# Allegro board my_democ2.brd
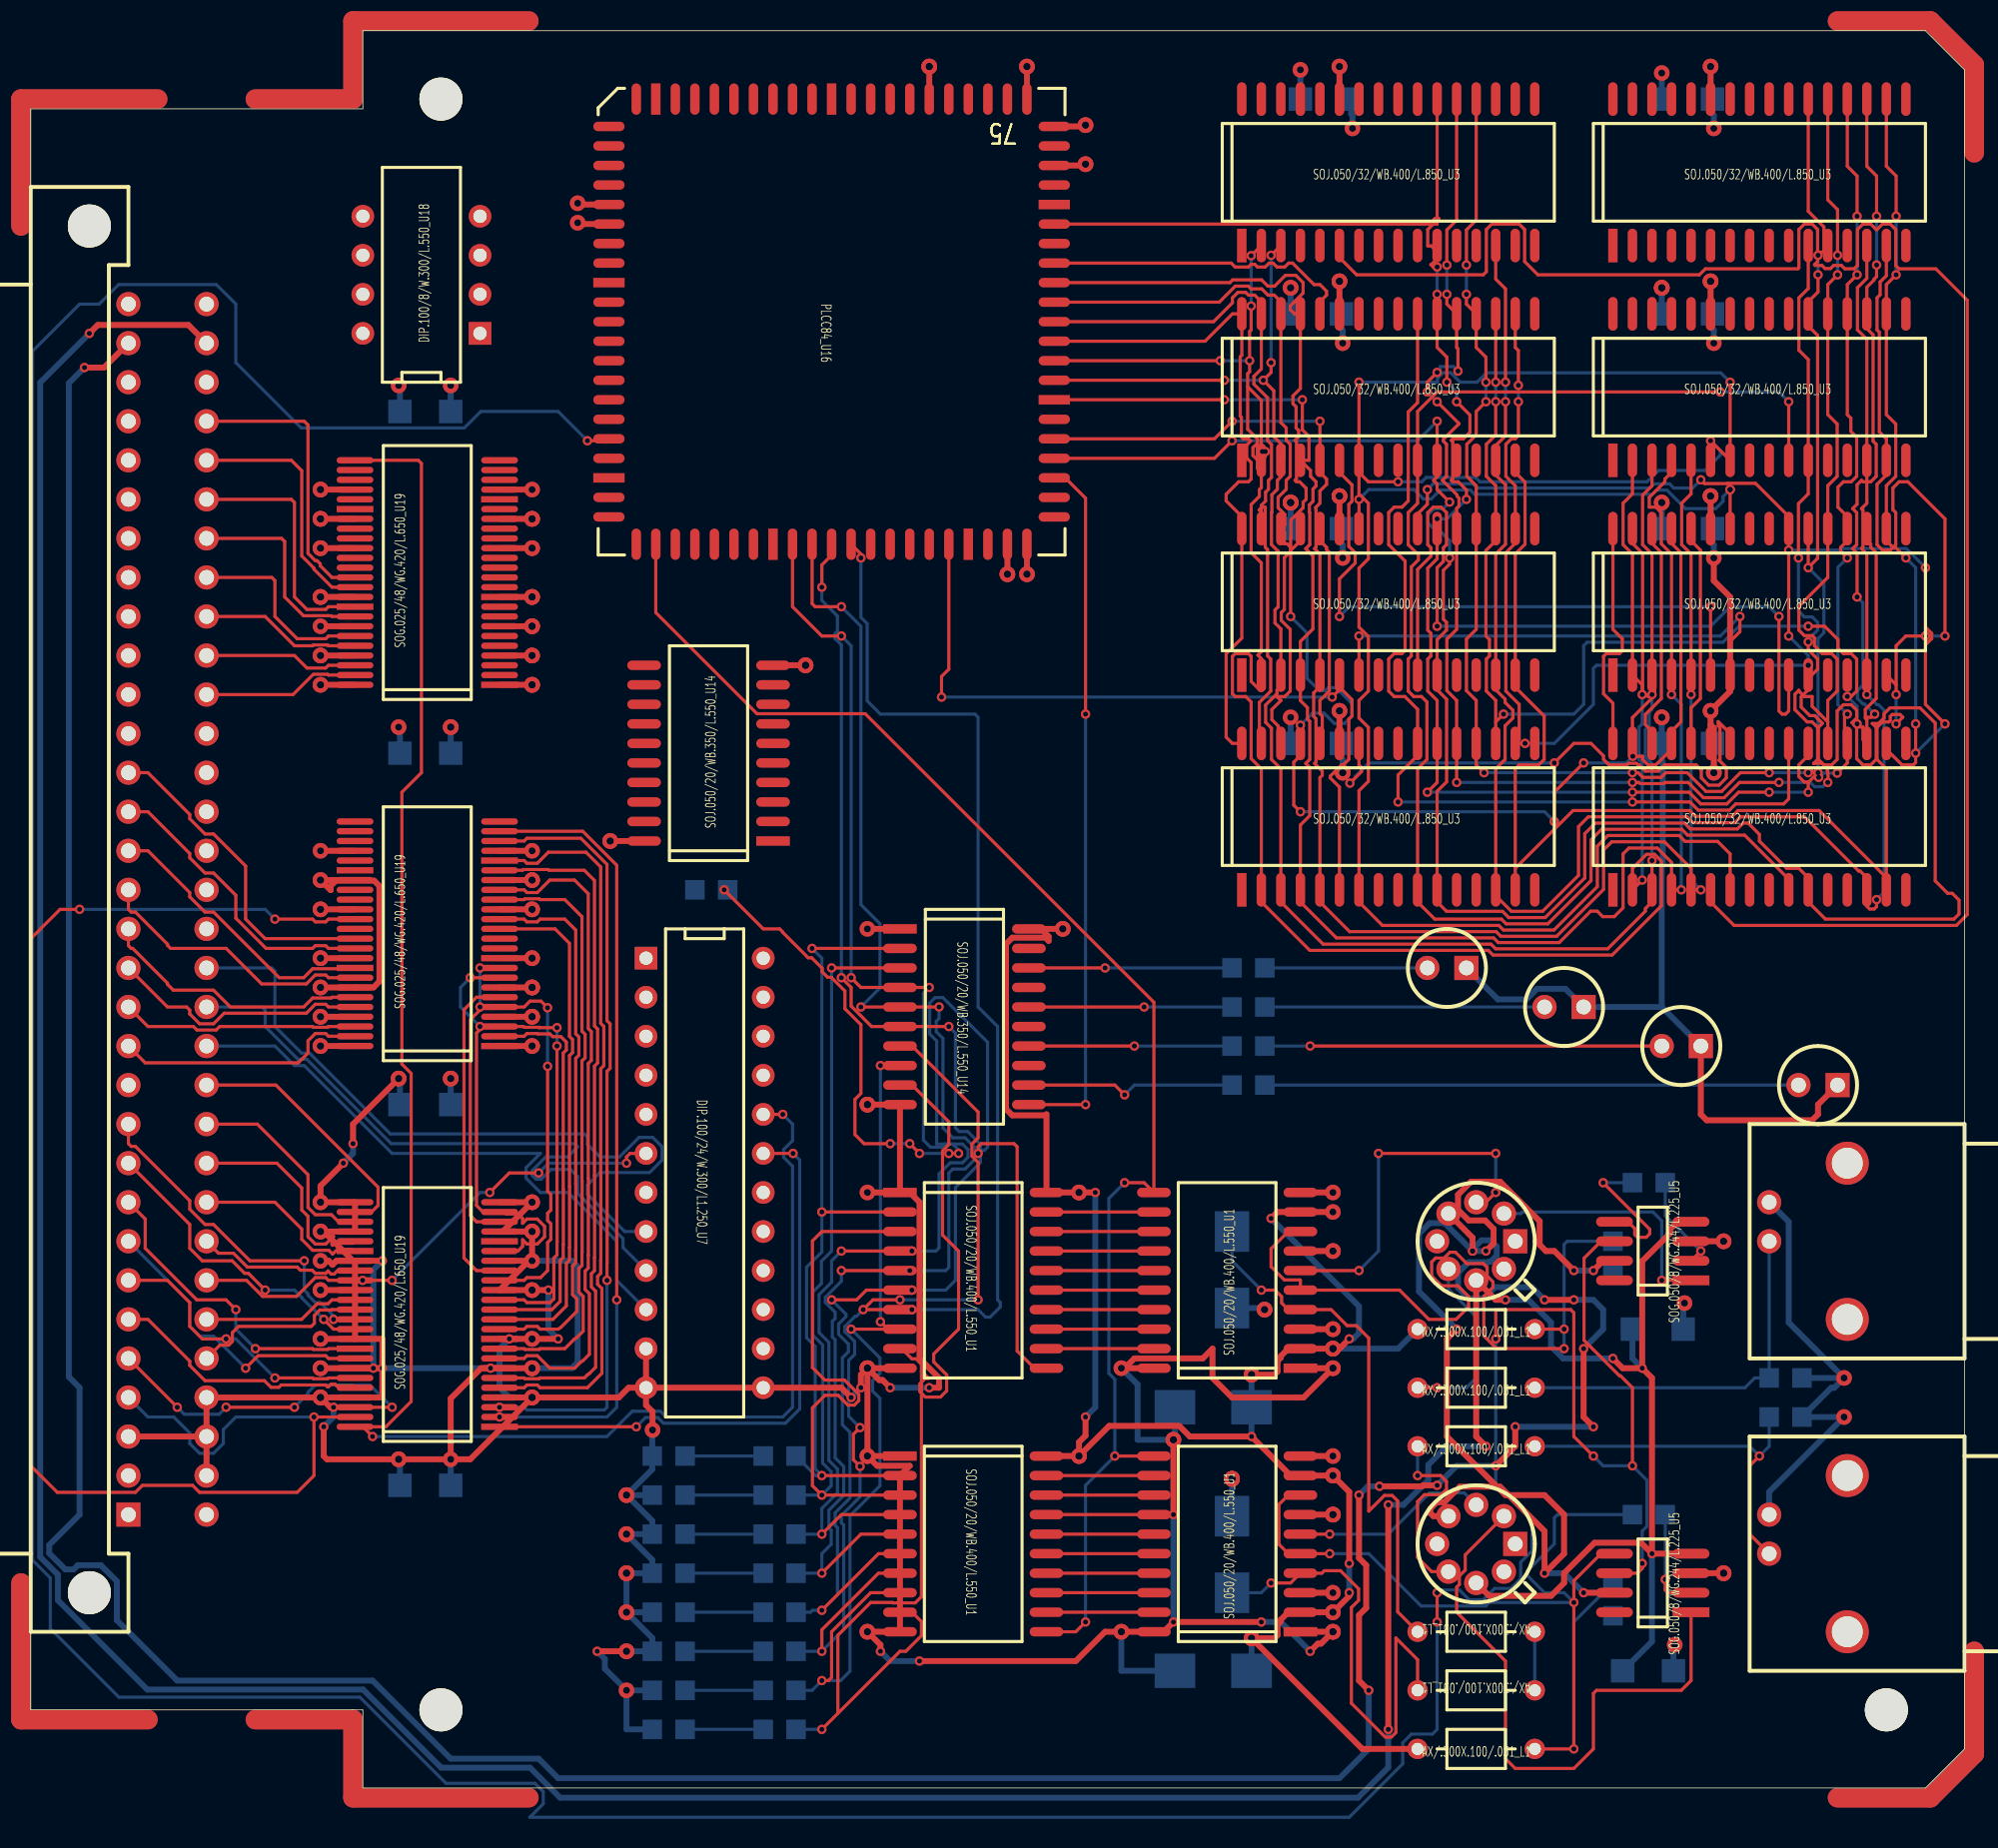
[diagram p0: board, top side]
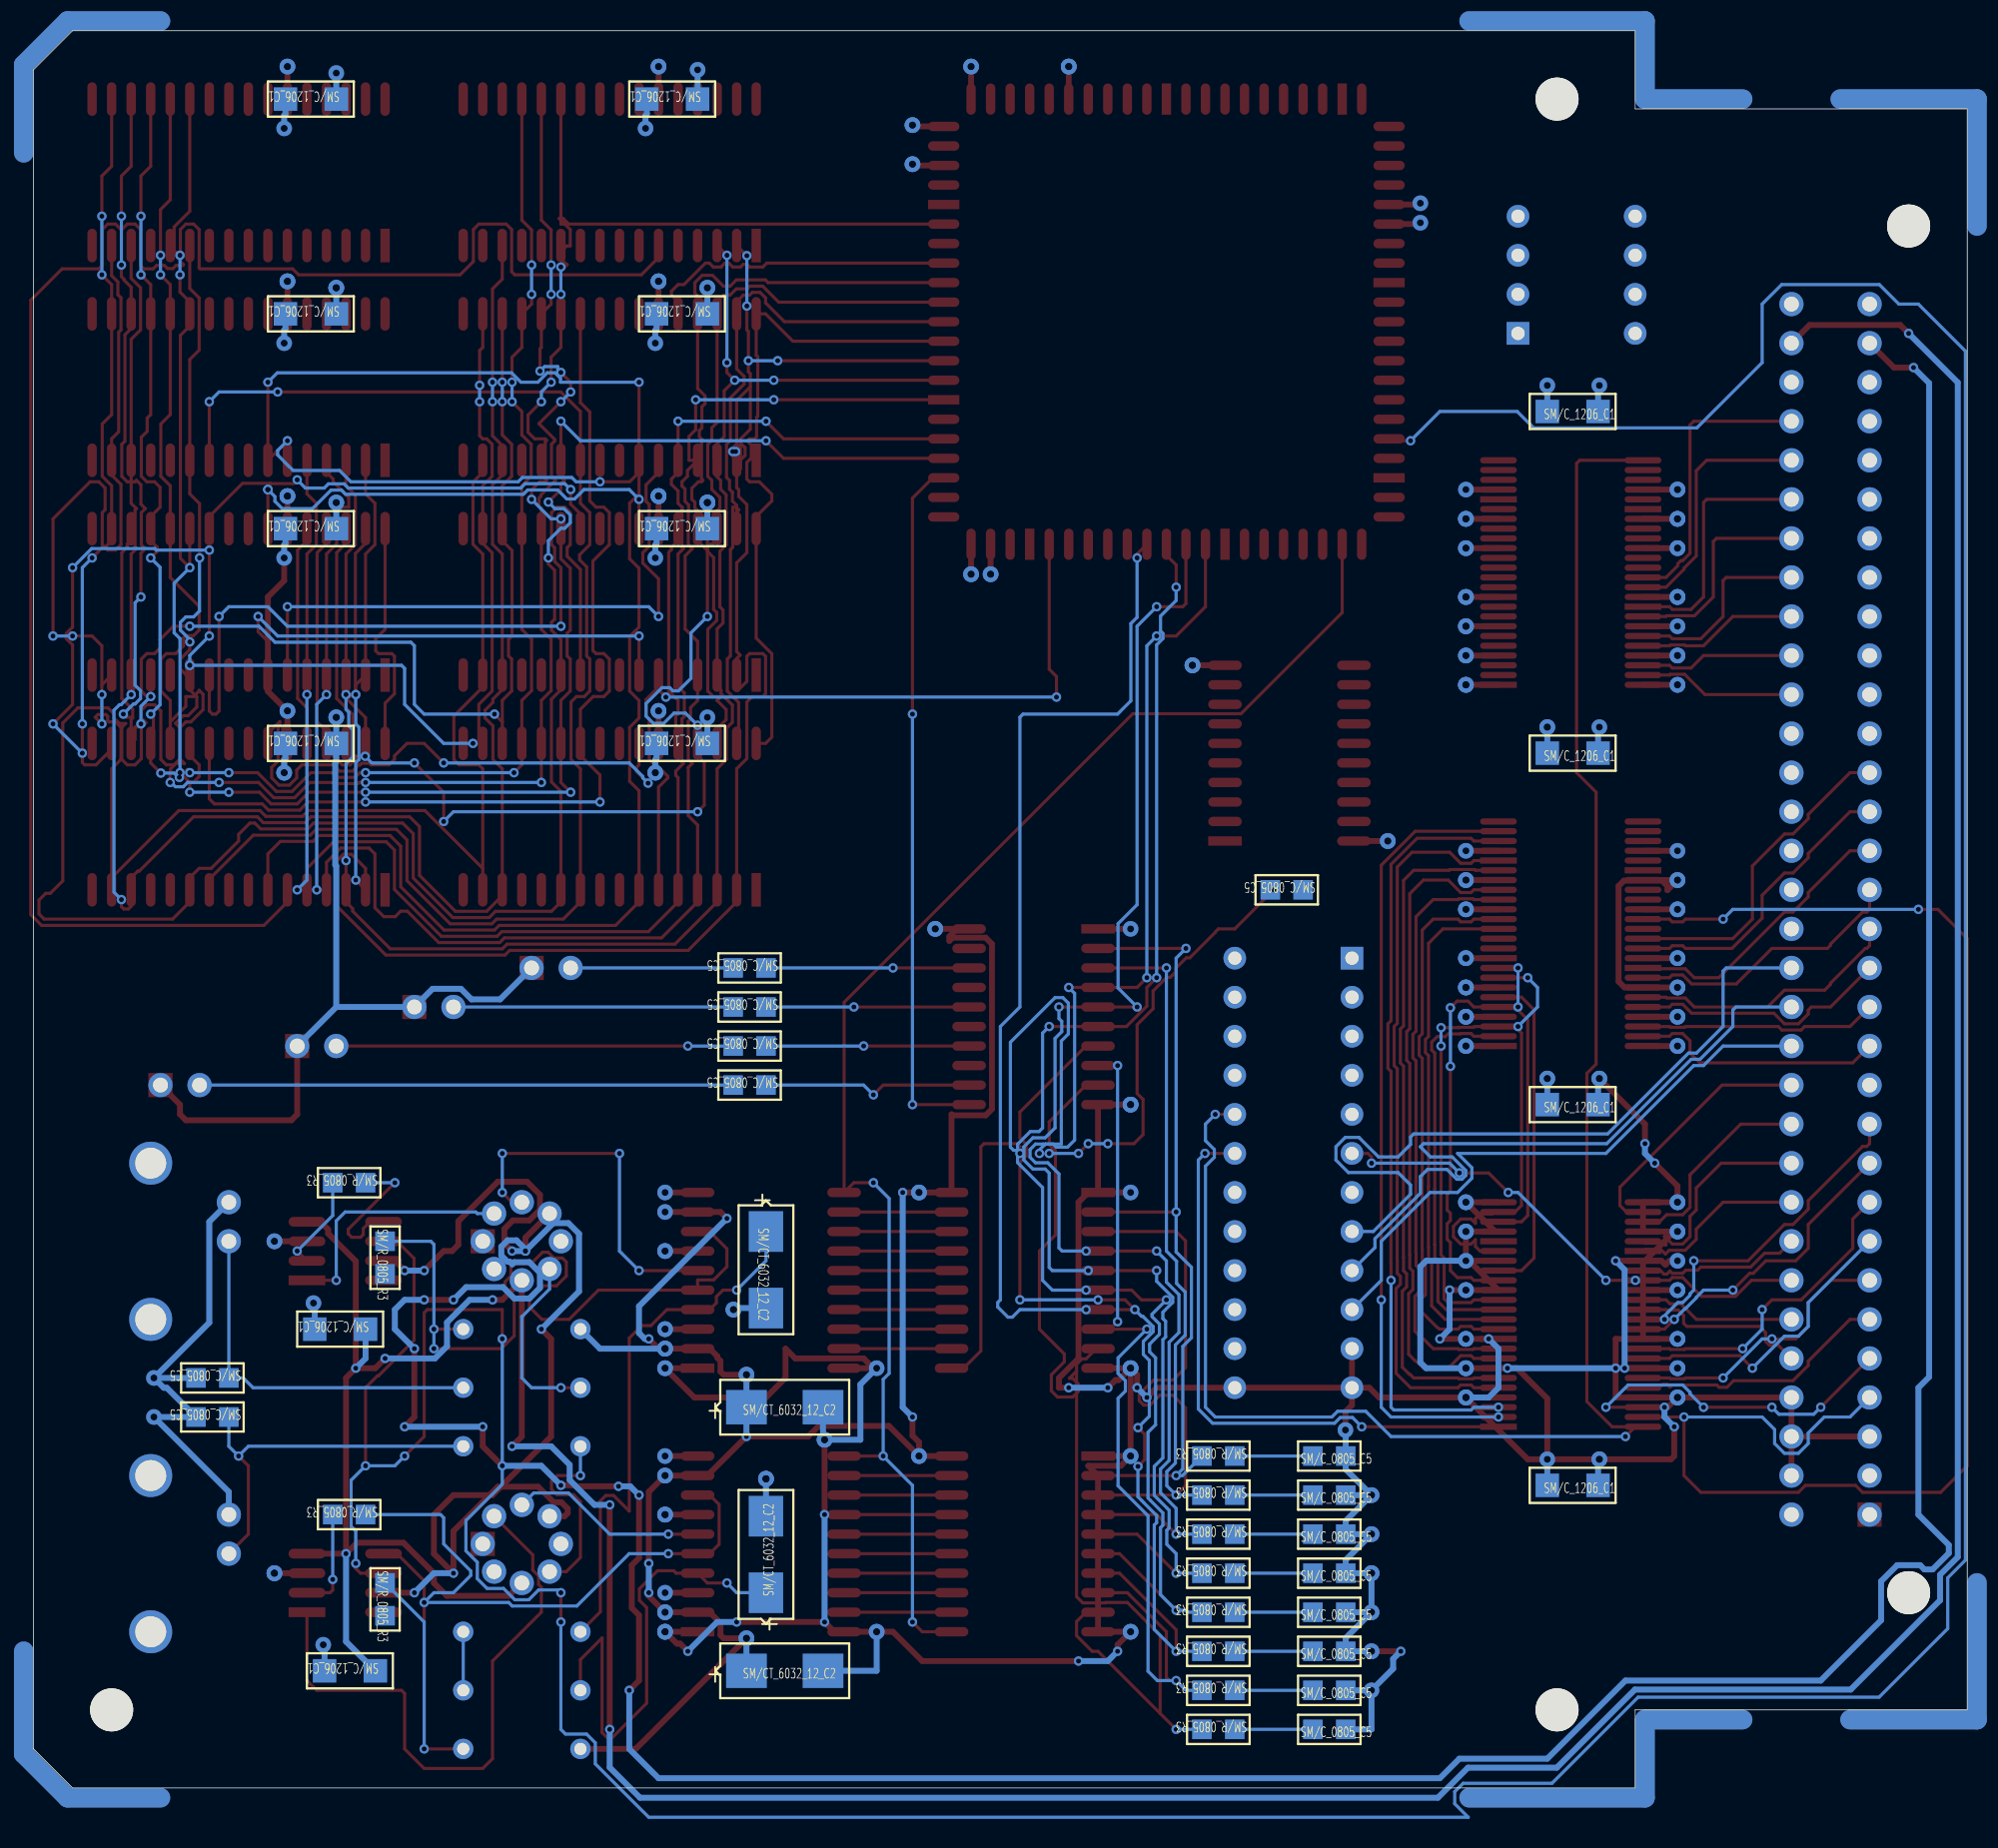
[diagram p1: board, bottom side, seen from below]

Outline 125.73 x 114.3 mm; copper layers: TOP, GND, POWER, BOTTOM. Coordinates in mm from the lower left corner of the outline.
Outline path: 0,109.22 21.59,109.22 21.59,114.3 123.19,114.3 125.73,111.76 125.73,2.54 123.19,0 21.59,0 21.59,5.08 0,5.08 0,109.22

## Design rules (mm)
nets with their own width: min track width 0.203; nets A0 A1 A2 A3 A4 A5 A6 A7 A8 A9 A10 A11 A12 A13 A14 A15 A16 A17 A18 A19 A20 A21 A22 A23 AEN/ BA0 BA1 BA2 BA3 BD0 BD1 BD2 BD3 BD4 BD5 BD6 BD7 BD8 BD9 BD10 BD11 BD12 BD13 BD14 BD15 BRD/ BRESET BWR/ D0 D1 D2 D3 D4 D5 D6 D7 D9 D10 D11 D12 D13 D14 D15 DDIR DEN/ DHEN/ FPGA/ GAIN HS/ MCLK MRD/ MWR/ N00036 N00036_6360 N00038 N00038_6372 N00044 N00044_6366 N00046 N00046_6362 N00048 N00048_6359 N00060 N00060_6368 N00306 N00318 N00322 N00671 N00689 N00703 N00717 N00827 N00831 N00835 N00837 N04966 N05690 N05692 N05694 N05696 N05698 N05700 N05702 N05704 N11940 N11950 N11984 N11994 N12004 N19706 N19710 N19714 N19718 N19934 N19938 N19942 N23417 N23878 N24816 N24821 N24826 N84247 N103899 N255822 N314771 N315146 N315333 N320476 N336036 N336041 OUTA OUTC RA0 RA1 RA2 RA3 RA4 RA5 RA6 RA7 RA8 RA9 RA10 RA11 RA12 RA13 RA14 RA15 RD0 RD1 RD2 RD3 RD4 RD5 RD6 RD7 RDY/ RESET/ SEL VCLKA VCLKC VD0 VD1 VD2 VD3 VD4 VD5 VD6 VD7 WAIT/ WSTAT/
nets with their own width: min track width 0.381; nets AGND GND GND_EARTH V12N V+12 VCC

## Placement (name value [footprint] x y rotation side)
C1  .1UF  [SMC1206]  104.14 29.84 0 bottom
C2  .1UF  [SMCT603212]  79.38 24.77 180 bottom
C3  .1UF  [SMCT603212]  79.38 7.62 180 bottom
C4  .1UF  [SMC1206]  106.05 109.86 0 bottom
C5  3300  [SMC0805]  42.55 6.35 180 bottom
C6  .1UF  [SMC1206]  103.51 7.62 0 bottom
C7  3300  [SMC0805]  42.55 21.59 180 bottom
C8  3300  [SMC0805]  42.55 8.89 180 bottom
C9  .1UF  [SMC1206]  27.3 89.53 180 bottom
C10  .1UF  [SMC1206]  27.3 67.31 180 bottom
C11  .1UF  [SMC1206]  27.3 44.45 180 bottom
C12  .1UF  [SMC1206]  106.05 81.91 0 bottom
C13  .1UF  [SMC1206]  106.05 95.89 0 bottom
C14  .1UF  [SMC1206]  106.05 67.95 0 bottom
C15  .1UF  [SMC1206]  27.3 19.69 180 bottom
C16  3300  [SMC0805]  42.55 11.43 180 bottom
C17  3300  [SMC0805]  42.55 13.97 180 bottom
C18  47PF  [SMC0805]  113.03 26.67 0 bottom
C19  3300  [SMC0805]  42.55 3.81 180 bottom
C20  3300  [SMC0805]  42.55 16.51 180 bottom
C21  .1UF  [SMCT603212]  78.11 12.7 90 bottom
C22  .1UF  [SMCT603212]  78.11 36.2 270 bottom
C23  47PF  [SMC0805]  113.03 24.13 0 bottom
C24  3300  [SMC0805]  42.55 19.05 180 bottom
C25  .1UF  [SMC1206]  82.55 109.86 0 bottom
C26  .1UF  [SMC1206]  81.92 95.89 0 bottom
C27  .1UF  [SMC1206]  81.92 81.91 0 bottom
C28  .1UF  [SMC1206]  81.92 67.95 0 bottom
D1  DIODE PHOTO EMIT  [LED]  100.97 50.8 180 top
D2  DIODE PHOTO EMIT  [LED]  93.34 53.34 180 top
D3  DIODE PHOTO EMIT  [LED]  108.59 48.26 180 top
D4  DIODE PHOTO EMIT  [LED]  117.48 45.72 180 top
J1  CON PAD  [DIN64P]  6.35 17.78 90 top
J2  CHANNEL 1  [BNC2P]  113.03 15.24 270 top
J3  CHANNEL 2  [BNC2P]  113.03 35.56 270 top
L1  50  [AX300X100031]  90.17 22.23 0 top
L2  50  [AX300X100031]  90.17 29.84 0 top
L3  50  [AX300X100031]  97.79 6.35 180 top
L4  50  [AX300X100031]  90.17 26.03 0 top
L5  50  [AX300X100031]  97.79 10.16 180 top
L6  50  [AX300X100031]  90.17 2.54 0 top
MTH1  -  [MTHOLE1]  26.67 109.86 0 top
MTH2  -  [MTHOLE1]  26.67 5.08 0 top
MTH3  -  [MTHOLE1]  120.65 5.08 0 top
R1  150  [SMC0805]  78.11 53.34 0 bottom
R2  150  [SMC0805]  78.11 50.8 0 bottom
R3  100  [SMR0805]  104.14 17.78 0 bottom
R4  100  [SMR0805]  102.87 13.34 270 bottom
R5  100  [SMR0805]  102.87 35.56 270 bottom
R6  100  [SMR0805]  104.14 39.37 0 bottom
R7  50  [SMR0805]  47.62 21.59 0 bottom
R8  50  [SMR0805]  47.62 8.89 0 bottom
R9  50  [SMR0805]  47.62 11.43 0 bottom
R10  50  [SMR0805]  47.62 6.35 0 bottom
R11  50  [SMC0805]  43.18 58.42 0 bottom
R12  150  [SMC0805]  78.11 45.72 0 bottom
R13  50  [SMR0805]  47.62 19.05 0 bottom
R14  50  [SMR0805]  47.62 16.51 0 bottom
R15  50  [SMR0805]  47.62 13.97 0 bottom
R16  50  [SMR0805]  47.62 3.81 0 bottom
R17  150  [SMC0805]  78.11 48.26 0 bottom
U1  TLC5602A  [SOJ05020WB400L550]  82.55 10.16 90 top
U2  TLC5602A  [SOJ05020WB400L550]  82.55 27.3 90 top
U3  TC55B4257J  [SOJ05032WB400L850]  102.87 86.36 0 top
U4  TC55B4257J  [SOJ05032WB400L850]  102.87 100.33 0 top
U5  DG419A  [SOG0508WG244L225]  107.95 33.02 90 top
U6  DG419A  [SOG0508WG244L225]  107.95 11.43 90 top
U7  20L10  [DIP10024W300L1250]  40 53.98 270 top
U8  TC55B4257J  [SOJ05032WB400L850]  78.74 72.39 0 top
U9  TC55B4257J  [SOJ05032WB400L850]  78.74 100.33 0 top
U10  TC55B4257J  [SOJ05032WB400L850]  102.87 72.39 0 top
U11  TC55B4257J  [SOJ05032WB400L850]  102.87 58.42 0 top
U12  TC55B4257J  [SOJ05032WB400L850]  78.74 58.42 0 top
U13  TC55B4257J  [SOJ05032WB400L850]  78.74 86.36 0 top
U14  ACT574  [SOJ05020WB350L550]  56.52 55.88 270 top
U15  ACT574  [SOJ05020WB400L550]  56.52 21.59 270 top
U16  EPF8282  [PLCC84]  52.07 109.86 270 top
U17  ACT574  [SOJ05020WB400L550]  56.52 38.73 270 top
U18  EPC1064  [DIP1008W300L550]  29.21 94.61 90 top
U19  FCT16245  [SOG02548WG420L650]  30.48 71.75 90 top
U20  FCT16245  [SOG02548WG420L650]  30.48 23.49 90 top
U21  FCT16245  [SOG02548WG420L650]  30.48 48.26 90 top
U22  TLE2037A  [TO-99]  96.52 35.56 90 top
U23  TLE2037A  [TO-99]  96.52 15.88 90 top
U25  74ACT574  [SOJ05020WB350L550]  48.26 61.59 90 top

## Library data of the parts
C1-C3 C5-C8 C16 C17 C19-C22 C24 = CAP: alternate symbols: (SMCT603212;SMC0805)
C4 C9-C15 C25-C28 = CAP_NP
C18 C23 = CAPACITOR
D1-D4 = DIODE_PHOTO_EMIT
J1 = 64CONSEPPINS
J2 J3 = BNC
L1-L6 = INDUCTOR
MTH1-MTH3 = MTHOLE1
R1-R17 = R: alternate symbols: (SMR0805)
U1 U2 = TLC5602A
U3 U4 U8-U13 = TC56B4257J
U5 U6 = DG419A
U7 = 20L10
U14 U15 U17 = ACT574: alternate symbols: (SOJ05020WB400L550)
U16 = FPGA_0
U18 = EPC1064
U19-U21 = FCT16245
U22 U23 = TLE2037A
U25 = 74ACT574

## Footprints (pads in the part's own frame, mm; a bottom-side part is the same pattern mirrored in y, then rotated)
AX300X100031
  round 1.321 hole 0.787: 1(0,0) 2(7.62,0)
BNC2P
  round 1.575 hole 0.965: 1(0,0) 2(-2.54,0)
  round 2.794 hole 2.007: 3(5.08,5.08) 4(-5.08,5.08)
DIN64P
  rect 1.575x1.575 hole 0.965: 1(0,0)
  round 1.575 hole 0.965: 2(2.54,0) 3(5.08,0) 4(7.62,0) 5(10.16,0) 6(12.7,0) 7(15.24,0) 8(17.78,0) 9(20.32,0) 10(22.86,0) 11(25.4,0) 12(27.94,0) 13(30.48,0) 14(33.02,0) 15(35.56,0) 16(38.1,0) 17(40.64,0) 18(43.18,0) 19(45.72,0) 20(48.26,0) 21(50.8,0) 22(53.34,0) 23(55.88,0) 24(58.42,0) 25(60.96,0) 26(63.5,0) 27(66.04,0) 28(68.58,0) 29(71.12,0) 30(73.66,0) 31(76.2,0) 32(78.74,0) 33(0,-5.08) 34(2.54,-5.08) 35(5.08,-5.08) 36(7.62,-5.08) 37(10.16,-5.08) 38(12.7,-5.08) 39(15.24,-5.08) 40(17.78,-5.08) 41(20.32,-5.08) 42(22.86,-5.08) 43(25.4,-5.08) 44(27.94,-5.08) 45(30.48,-5.08) 46(33.02,-5.08) 47(35.56,-5.08) 48(38.1,-5.08) 49(40.64,-5.08) 50(43.18,-5.08) 51(45.72,-5.08) 52(48.26,-5.08) 53(50.8,-5.08) 54(53.34,-5.08) 55(55.88,-5.08) 56(58.42,-5.08) 57(60.96,-5.08) 58(63.5,-5.08) 59(66.04,-5.08) 60(68.58,-5.08) 61(71.12,-5.08) 62(73.66,-5.08) 63(76.2,-5.08) 64(78.74,-5.08)
  round 2.794 hole 2.794: 65(83.82,2.54) 66(-5.08,2.54)
DIP1008W300L550
  rect 1.473x1.473 hole 0.864: 1(0,0)
  round 1.473 hole 0.864: 2(2.54,0) 3(5.08,0) 4(7.62,0) 5(7.62,7.62) 6(5.08,7.62) 7(2.54,7.62) 8(0,7.62)
DIP10024W300L1250
  rect 1.473x1.473 hole 0.864: 1(0,0)
  round 1.473 hole 0.864: 2(2.54,0) 3(5.08,0) 4(7.62,0) 5(10.16,0) 6(12.7,0) 7(15.24,0) 8(17.78,0) 9(20.32,0) 10(22.86,0) 11(25.4,0) 12(27.94,0) 13(27.94,7.62) 14(25.4,7.62) 15(22.86,7.62) 16(20.32,7.62) 17(17.78,7.62) 18(15.24,7.62) 19(12.7,7.62) 20(10.16,7.62) 21(7.62,7.62) 22(5.08,7.62) 23(2.54,7.62) 24(0,7.62)
LED
  rect 1.575x1.575 hole 0.965: 1(0,0)
  round 1.575 hole 0.965: 2(2.54,0)
MTHOLE1
  round 2.794 hole 2.794: 1(0,0)
PLCC84
  rect 2.032x0.61 smd: 1(0,0) 10(0,-11.43) 40(28.956,-3.81) 50(28.956,8.89)
  oval 2.032x0.61 smd: 2(0,-1.27) 3(0,-2.54) 4(0,-3.81) 5(0,-5.08) 6(0,-6.35) 7(0,-7.62) 8(0,-8.89) 9(0,-10.16) 11(0,-12.7) 33(28.956,-12.7) 34(28.956,-11.43) 35(28.956,-10.16) 36(28.956,-8.89) 37(28.956,-7.62) 38(28.956,-6.35) 39(28.956,-5.08) 41(28.956,-2.54) 42(28.956,-1.27) 43(28.956,0) 44(28.956,1.27) 45(28.956,2.54) 46(28.956,3.81) 47(28.956,5.08) 48(28.956,6.35) 49(28.956,7.62) 51(28.956,10.16) 52(28.956,11.43) 53(28.956,12.7) 75(0,12.7) 76(0,11.43) 77(0,10.16) 78(0,8.89) 79(0,7.62) 80(0,6.35) 81(0,5.08) 82(0,3.81) 83(0,2.54) 84(0,1.27)
  oval 0.61x2.032 smd: 12(1.778,-14.478) 13(3.048,-14.478) 14(4.318,-14.478) 15(5.588,-14.478) 16(6.858,-14.478) 17(8.128,-14.478) 18(9.398,-14.478) 19(10.668,-14.478) 21(13.208,-14.478) 22(14.478,-14.478) 23(15.748,-14.478) 24(17.018,-14.478) 25(18.288,-14.478) 26(19.558,-14.478) 27(20.828,-14.478) 28(22.098,-14.478) 29(23.368,-14.478) 31(25.908,-14.478) 32(27.178,-14.478) 54(27.178,14.478) 55(25.908,14.478) 56(24.638,14.478) 57(23.368,14.478) 58(22.098,14.478) 59(20.828,14.478) 61(18.288,14.478) 62(17.018,14.478) 63(15.748,14.478) 64(14.478,14.478) 65(13.208,14.478) 66(11.938,14.478) 67(10.668,14.478) 68(9.398,14.478) 69(8.128,14.478) 71(5.588,14.478) 72(4.318,14.478) 73(3.048,14.478) 74(1.778,14.478)
  rect 0.61x2.032 smd: 20(11.938,-14.478) 30(24.638,-14.478) 60(19.558,14.478) 70(6.858,14.478)
SMC0805
  rect 1.27x1.27 smd: 1(0,0) 2(2.134,0)
SMC1206
  rect 1.524x1.524 smd: 1(0,0) 2(3.302,0)
SMCT603212
  rect 2.642x2.235 smd: 1(0,0) 2(4.978,0)
SMR0805
  rect 1.27x1.27 smd: 1(0,0) 2(2.134,0)
SOG0508WG244L225
  rect 0.635x2.388 smd: 1(0,0)
  oval 0.635x2.388 smd: 2(1.27,0) 3(2.54,0) 4(3.81,0) 5(3.81,4.978) 6(2.54,4.978) 7(1.27,4.978) 8(0,4.978)
SOG02548WG420L650
  rect 0.406x2.388 smd: 1(0,0) 10(5.715,0) 20(12.065,0) 30(11.43,9.398) 40(5.08,9.398)
  oval 0.406x2.388 smd: 2(0.635,0) 3(1.27,0) 4(1.905,0) 5(2.54,0) 6(3.175,0) 7(3.81,0) 8(4.445,0) 9(5.08,0) 11(6.35,0) 12(6.985,0) 13(7.62,0) 14(8.255,0) 15(8.89,0) 16(9.525,0) 17(10.16,0) 18(10.795,0) 19(11.43,0) 21(12.7,0) 22(13.335,0) 23(13.97,0) 24(14.605,0) 25(14.605,9.398) 26(13.97,9.398) 27(13.335,9.398) 28(12.7,9.398) 29(12.065,9.398) 31(10.795,9.398) 32(10.16,9.398) 33(9.525,9.398) 34(8.89,9.398) 35(8.255,9.398) 36(7.62,9.398) 37(6.985,9.398) 38(6.35,9.398) 39(5.715,9.398) 41(4.445,9.398) 42(3.81,9.398) 43(3.175,9.398) 44(2.54,9.398) 45(1.905,9.398) 46(1.27,9.398) 47(0.635,9.398) 48(0,9.398)
SOJ05020WB350L550
  rect 0.61x2.184 smd: 1(0,0)
  oval 0.61x2.184 smd: 2(1.27,0) 3(2.54,0) 4(3.81,0) 5(5.08,0) 6(6.35,0) 7(7.62,0) 8(8.89,0) 9(10.16,0) 10(11.43,0) 11(11.43,8.382) 12(10.16,8.382) 13(8.89,8.382) 14(7.62,8.382) 15(6.35,8.382) 16(5.08,8.382) 17(3.81,8.382) 18(2.54,8.382) 19(1.27,8.382) 20(0,8.382)
SOJ05020WB400L550
  rect 0.61x2.184 smd: 1(0,0)
  oval 0.61x2.184 smd: 2(1.27,0) 3(2.54,0) 4(3.81,0) 5(5.08,0) 6(6.35,0) 7(7.62,0) 8(8.89,0) 9(10.16,0) 10(11.43,0) 11(11.43,9.525) 12(10.16,9.525) 13(8.89,9.525) 14(7.62,9.525) 15(6.35,9.525) 16(5.08,9.525) 17(3.81,9.525) 18(2.54,9.525) 19(1.27,9.525) 20(0,9.525)
SOJ05032WB400L850
  rect 0.61x2.184 smd: 1(0,0)
  oval 0.61x2.184 smd: 2(1.27,0) 3(2.54,0) 4(3.81,0) 5(5.08,0) 6(6.35,0) 7(7.62,0) 8(8.89,0) 9(10.16,0) 10(11.43,0) 11(12.7,0) 12(13.97,0) 13(15.24,0) 14(16.51,0) 15(17.78,0) 16(19.05,0) 17(19.05,9.525) 18(17.78,9.525) 19(16.51,9.525) 20(15.24,9.525) 21(13.97,9.525) 22(12.7,9.525) 23(11.43,9.525) 24(10.16,9.525) 25(8.89,9.525) 26(7.62,9.525) 27(6.35,9.525) 28(5.08,9.525) 29(3.81,9.525) 30(2.54,9.525) 31(1.27,9.525) 32(0,9.525)
TO-99
  rect 1.575x1.575 hole 0.965: 1(0,0)
  round 1.575 hole 0.965: 2(1.803,0.737) 3(2.54,2.54) 4(1.803,4.343) 5(0,5.08) 6(-1.803,4.343) 7(-2.54,2.54) 8(-1.803,0.737)

## Nets
AGND: C1.2(TP-2) C6.2(TP-2) C21.2(TP-2) C22.2(TP-2) J1.1(TP-1) J1.2(TP-2) J1.33(TP-33) U1.3(TP-3) U1.7(TP-7) U1.10(TP-10) U2.3(TP-3) U2.7(TP-7) U2.10(TP-10) U5.3(TP-3) U6.3(TP-3)
GND: C2.2(TP-2) C3.2(TP-2) C4.2(TP-2) C5.2(TP-2) C7.2(TP-2) C8.2(TP-2) C9.2(TP-2) C10.2(TP-2) C11.2(TP-2) C12.2(TP-2) C13.2(TP-2) C14.2(TP-2) C15.2(TP-2) C16.2(TP-2) C17.2(TP-2) C19.2(TP-2) C20.2(TP-2) C24.2(TP-2) C25.2(TP-2) C26.2(TP-2) C27.2(TP-2) C28.2(TP-2) J1.3(TP-3) J1.34(TP-34) J1.35(TP-35) J1.36(TP-36) U1.1(TP-1) U1.20(TP-20) U2.1(TP-1) U2.20(TP-20) U3.27(TP-27) U4.27(TP-27) U7.11(TP-11) U7.12(TP-12) U7.13(TP-13) U8.27(TP-27) U9.27(TP-27) U10.27(TP-27) U11.27(TP-27) U12.27(TP-27) U13.27(TP-27) U14.1(TP-1) U14.10(TP-10) U15.1(TP-1) U15.10(TP-10) U16.17(TP-17) U16.53(TP-53) U16.74(TP-74) U16.75(TP-75) U17.1(TP-1) U17.10(TP-10) U19.1(TP-1) U19.4(TP-4) U19.10(TP-10) U19.15(TP-15) U19.21(TP-21) U19.28(TP-28) U19.34(TP-34) U19.39(TP-39) U19.45(TP-45) U19.48(TP-48) U20.4(TP-4) U20.10(TP-10) U20.15(TP-15) U20.21(TP-21) U20.24(TP-24) U20.25(TP-25) U20.28(TP-28) U20.34(TP-34) U20.39(TP-39) U20.45(TP-45) U21.1(TP-1) U21.4(TP-4) U21.10(TP-10) U21.15(TP-15) U21.21(TP-21) U21.28(TP-28) U21.34(TP-34) U21.39(TP-39) U21.45(TP-45) U21.48(TP-48) U25.10(TP-10)
GND_EARTH: C18.2(TP-2) C23.2(TP-2) J2.2(TP-2) J3.2(TP-2)
V12N: J1.31(TP-31) J1.32(TP-32) U5.7(TP-7) U6.7(TP-7) U22.4(TP-4) U23.4(TP-4)
VCC: C2.1(TP-1) C3.1(TP-1) C4.1(TP-1) C9.1(TP-1) C10.1(TP-1) C11.1(TP-1) C12.1(TP-1) C13.1(TP-1) C14.1(TP-1) C15.1(TP-1) C25.1(TP-1) C26.1(TP-1) C27.1(TP-1) C28.1(TP-1) D1.1(TP-1) D2.1(TP-1) D3.1(TP-1) D4.1(TP-1) J1.29(TP-29) J1.30(TP-30) J1.62(TP-62) L2.1(TP-1) L6.1(TP-1) U1.2(TP-2) U1.9(TP-9) U2.2(TP-2) U2.9(TP-9) U7.24(TP-24) U14.20(TP-20) U15.20(TP-20) U16.16(TP-16) U16.52(TP-52) U16.72(TP-72) U16.80(TP-80) U17.20(TP-20) U19.7(TP-7) U19.18(TP-18) U19.31(TP-31) U19.42(TP-42) U20.7(TP-7) U20.18(TP-18) U20.31(TP-31) U20.42(TP-42) U21.7(TP-7) U21.18(TP-18) U21.31(TP-31) U21.42(TP-42) U25.20(TP-20)
A0: J1.54(TP-54) U19.47(TP-47)
A1: J1.55(TP-55) U19.46(TP-46)
A2: J1.56(TP-56) U19.44(TP-44)
A3: J1.57(TP-57) U19.43(TP-43)
A4: J1.58(TP-58) U19.41(TP-41)
A5: J1.59(TP-59) U19.40(TP-40)
A6: J1.60(TP-60) U19.38(TP-38)
A7: J1.61(TP-61) U19.37(TP-37)
A8: J1.13(TP-13) U21.47(TP-47)
A9: J1.14(TP-14) U21.46(TP-46)
A10: J1.15(TP-15) U21.44(TP-44)
A11: J1.16(TP-16) U21.43(TP-43)
A12: J1.17(TP-17) U21.41(TP-41)
A13: J1.18(TP-18) U21.40(TP-40)
A14: J1.19(TP-19) U21.38(TP-38)
A15: J1.20(TP-20) U21.37(TP-37)
A16: J1.37(TP-37) U20.36(TP-36)
A17: J1.38(TP-38) U20.35(TP-35)
A18: J1.39(TP-39) U7.6(TP-6) U20.33(TP-33)
A19: J1.40(TP-40) U7.5(TP-5) U20.32(TP-32)
A20: J1.41(TP-41) U7.4(TP-4) U20.30(TP-30)
A21: J1.42(TP-42) U7.3(TP-3) U20.29(TP-29)
A22: J1.43(TP-43) U7.2(TP-2) U20.27(TP-27)
A23: J1.44(TP-44) U7.1(TP-1) U20.26(TP-26)
AEN/: J1.47(TP-47) U7.8(TP-8)
BA0: U16.6(TP-6) U19.2(TP-2) U20.13(TP-13) U21.2(TP-2)
BA1: U16.7(TP-7) U19.3(TP-3) U20.14(TP-14) U21.3(TP-3)
BA2: U16.8(TP-8) U19.5(TP-5) U20.16(TP-16) U21.5(TP-5)
BA3: U16.9(TP-9) U19.6(TP-6) U20.17(TP-17) U21.6(TP-6)
BD0: U16.25(TP-25) U19.13(TP-13)
BD1: U16.24(TP-24) U19.14(TP-14)
BD2: U16.23(TP-23) U19.16(TP-16)
BD3: U16.22(TP-22) U19.17(TP-17)
BD4: U16.21(TP-21) U19.19(TP-19)
BD5: U16.20(TP-20) U19.20(TP-20)
BD6: U16.19(TP-19) U19.22(TP-22)
BD7: U16.18(TP-18) U19.23(TP-23)
BD8: U20.2(TP-2) U21.23(TP-23)
BD9: U20.3(TP-3) U21.22(TP-22)
BD10: U20.5(TP-5) U21.20(TP-20)
BD11: U20.6(TP-6) U21.19(TP-19)
BD12: U20.8(TP-8) U21.17(TP-17)
BD13: U20.9(TP-9) U21.16(TP-16)
BD14: U20.11(TP-11) U21.14(TP-14)
BD15: U20.12(TP-12) U21.13(TP-13)
BRD/: U7.15(TP-15) U16.73(TP-73)
BRESET: U7.14(TP-14) U16.12(TP-12)
BWR/: U7.16(TP-16) U16.54(TP-54)
D0: J1.28(TP-28) U19.26(TP-26) U21.26(TP-26)
D1: J1.27(TP-27) U19.27(TP-27) U21.27(TP-27)
D2: J1.26(TP-26) U19.29(TP-29) U21.29(TP-29)
D3: J1.25(TP-25) U19.30(TP-30) U21.30(TP-30)
D4: J1.24(TP-24) U19.32(TP-32) U21.32(TP-32)
D5: J1.23(TP-23) U19.33(TP-33) U21.33(TP-33)
D6: J1.4(TP-4) J1.22(TP-22) U19.35(TP-35) U20.47(TP-47) U21.35(TP-35)
D7: J1.21(TP-21) U19.36(TP-36) U21.36(TP-36)
D9: J1.5(TP-5) U20.46(TP-46)
D10: J1.6(TP-6) U20.44(TP-44)
D11: J1.7(TP-7) U20.43(TP-43)
D12: J1.8(TP-8) U20.41(TP-41)
D13: J1.9(TP-9) U20.40(TP-40)
D14: J1.10(TP-10) U20.38(TP-38)
D15: J1.11(TP-11) U20.37(TP-37)
DDIR: U7.19(TP-19) U19.24(TP-24) U20.1(TP-1) U21.24(TP-24)
DEN/: U7.20(TP-20) U19.25(TP-25) U20.48(TP-48)
DHEN/: U7.21(TP-21) U21.25(TP-25)
FPGA/: U7.17(TP-17) U16.30(TP-30)
GAIN: U5.6(TP-6) U6.6(TP-6) U16.28(TP-28)
HS/: U7.18(TP-18) U16.29(TP-29)
MCLK: J1.52(TP-52) U16.31(TP-31)
MRD/: J1.46(TP-46) U7.9(TP-9)
MWR/: J1.45(TP-45) U7.10(TP-10)
N00036_6360: L6.2(TP-2) R3.1(TP-1) R4.1(TP-1) U1.5(TP-5) U1.8(TP-8) U6.5(TP-5)
N00038_6372: C21.1(TP-1) L3.2(TP-2) U1.4(TP-4)
N00044_6366: U6.1(TP-1) U23.2(TP-2)
N00046_6362: R4.2(TP-2) U6.8(TP-8)
N00048_6359: R3.2(TP-2) U6.2(TP-2)
N00060_6368: U1.6(TP-6) U23.3(TP-3)
OUTA: L1.1(TP-1) U23.6(TP-6)
OUTC: L4.1(TP-1) U22.6(TP-6)
RA0: U3.5(TP-5) U4.5(TP-5) U8.5(TP-5) U9.5(TP-5) U10.5(TP-5) U11.5(TP-5) U12.5(TP-5) U13.5(TP-5) U16.58(TP-58)
RA1: U3.4(TP-4) U4.4(TP-4) U8.4(TP-4) U9.4(TP-4) U10.4(TP-4) U11.4(TP-4) U12.4(TP-4) U13.4(TP-4) U16.60(TP-60)
RA2: U3.3(TP-3) U4.3(TP-3) U8.3(TP-3) U9.3(TP-3) U10.3(TP-3) U11.3(TP-3) U12.3(TP-3) U13.3(TP-3) U16.61(TP-61)
RA3: U3.2(TP-2) U4.2(TP-2) U8.2(TP-2) U9.2(TP-2) U10.2(TP-2) U11.2(TP-2) U12.2(TP-2) U13.2(TP-2) U16.62(TP-62)
RA4: U3.32(TP-32) U4.32(TP-32) U8.32(TP-32) U9.32(TP-32) U10.32(TP-32) U11.32(TP-32) U12.32(TP-32) U13.32(TP-32) U16.63(TP-63)
RA5: U3.31(TP-31) U4.31(TP-31) U8.31(TP-31) U9.31(TP-31) U10.31(TP-31) U11.31(TP-31) U12.31(TP-31) U13.31(TP-31) U16.64(TP-64)
RA6: U3.30(TP-30) U4.30(TP-30) U8.30(TP-30) U9.30(TP-30) U10.30(TP-30) U11.30(TP-30) U12.30(TP-30) U13.30(TP-30) U16.65(TP-65)
RA7: U3.29(TP-29) U4.29(TP-29) U8.29(TP-29) U9.29(TP-29) U10.29(TP-29) U11.29(TP-29) U12.29(TP-29) U13.29(TP-29) U16.66(TP-66)
RA8: U3.28(TP-28) U4.28(TP-28) U8.28(TP-28) U9.28(TP-28) U10.28(TP-28) U11.28(TP-28) U12.28(TP-28) U13.28(TP-28) U16.67(TP-67)
RA9: U3.22(TP-22) U4.22(TP-22) U8.22(TP-22) U9.22(TP-22) U10.22(TP-22) U11.22(TP-22) U12.22(TP-22) U13.22(TP-22) U16.69(TP-69)
RA10: U3.21(TP-21) U4.21(TP-21) U8.21(TP-21) U9.21(TP-21) U10.21(TP-21) U11.21(TP-21) U12.21(TP-21) U13.21(TP-21) U16.70(TP-70)
RA11: U3.20(TP-20) U4.20(TP-20) U8.20(TP-20) U9.20(TP-20) U10.20(TP-20) U11.20(TP-20) U12.20(TP-20) U13.20(TP-20) U16.71(TP-71)
RA12: U3.19(TP-19) U4.19(TP-19) U8.19(TP-19) U9.19(TP-19) U10.19(TP-19) U11.19(TP-19) U12.19(TP-19) U13.19(TP-19) U16.76(TP-76)
RA13: U3.18(TP-18) U4.18(TP-18) U8.18(TP-18) U9.18(TP-18) U10.18(TP-18) U11.18(TP-18) U12.18(TP-18) U13.18(TP-18) U16.77(TP-77)
RA14: U3.15(TP-15) U4.15(TP-15) U8.15(TP-15) U9.15(TP-15) U10.15(TP-15) U11.15(TP-15) U12.15(TP-15) U13.15(TP-15) U16.78(TP-78)
RA15: U3.14(TP-14) U4.14(TP-14) U8.14(TP-14) U9.14(TP-14) U10.14(TP-14) U11.14(TP-14) U12.14(TP-14) U13.14(TP-14) U16.79(TP-79)
RD0: U4.26(TP-26) U8.26(TP-26) U9.26(TP-26) U10.26(TP-26) U16.81(TP-81)
RD1: U4.23(TP-23) U8.23(TP-23) U9.23(TP-23) U10.23(TP-23) U16.82(TP-82)
RD2: U4.10(TP-10) U8.10(TP-10) U9.10(TP-10) U10.10(TP-10) U16.83(TP-83)
RD3: U4.7(TP-7) U8.7(TP-7) U9.7(TP-7) U10.7(TP-7) U16.84(TP-84)
RD4: U3.26(TP-26) U11.26(TP-26) U12.26(TP-26) U13.26(TP-26) U16.1(TP-1)
RD5: U3.23(TP-23) U11.23(TP-23) U12.23(TP-23) U13.23(TP-23) U16.2(TP-2)
RD6: U3.10(TP-10) U11.10(TP-10) U12.10(TP-10) U13.10(TP-10) U16.3(TP-3)
RD7: U3.7(TP-7) U11.7(TP-7) U12.7(TP-7) U13.7(TP-7) U16.4(TP-4)
RDY/: J1.50(TP-50) U7.22(TP-22)
RESET/: J1.53(TP-53) U16.15(TP-15)
SEL: U7.23(TP-23) U16.13(TP-13)
V+12: C1.1(TP-1) C6.1(TP-1) J1.63(TP-63) J1.64(TP-64) U5.4(TP-4) U6.4(TP-4) U22.7(TP-7) U23.7(TP-7)
VCLKA: U1.11(TP-11) U2.11(TP-11) U15.11(TP-11) U16.34(TP-34)
VCLKC: R11.2(TP-2) U17.11(TP-11)
VD0: R7.2(TP-2) U14.2(TP-2) U15.2(TP-2) U16.39(TP-39) U17.2(TP-2)
VD1: R13.2(TP-2) U14.3(TP-3) U15.3(TP-3) U16.40(TP-40) U17.3(TP-3)
VD2: R14.2(TP-2) U14.4(TP-4) U15.4(TP-4) U16.41(TP-41) U17.4(TP-4)
VD3: R15.2(TP-2) U14.5(TP-5) U15.5(TP-5) U16.42(TP-42) U17.5(TP-5)
VD4: R9.2(TP-2) U14.6(TP-6) U15.6(TP-6) U16.43(TP-43) U17.6(TP-6)
VD5: R8.2(TP-2) U14.7(TP-7) U15.7(TP-7) U16.44(TP-44) U17.7(TP-7)
VD6: R10.2(TP-2) U14.8(TP-8) U15.8(TP-8) U16.45(TP-45) U17.8(TP-8)
VD7: R16.2(TP-2) U14.9(TP-9) U15.9(TP-9) U16.46(TP-46) U17.9(TP-9)
WAIT/: J1.51(TP-51) U16.33(TP-33)
WSTAT/: U14.11(TP-11) U16.56(TP-56)
N00036: L2.2(TP-2) R5.1(TP-1) R6.1(TP-1) U2.5(TP-5) U2.8(TP-8) U5.5(TP-5)
N00038: C22.1(TP-1) L5.2(TP-2) U2.4(TP-4)
N00044: U5.1(TP-1) U22.2(TP-2)
N00046: R5.2(TP-2) U5.8(TP-8)
N00048: R6.2(TP-2) U5.2(TP-2)
N00060: U2.6(TP-6) U22.3(TP-3)
N00306: U1.12(TP-12) U15.19(TP-19)
N00318: U1.15(TP-15) U15.16(TP-16)
N00322: U1.16(TP-16) U15.15(TP-15)
N00671: C19.1(TP-1) R16.1(TP-1)
N00689: C5.1(TP-1) R10.1(TP-1)
N00703: C8.1(TP-1) R8.1(TP-1)
N00717: C16.1(TP-1) R9.1(TP-1)
N00827: C17.1(TP-1) R15.1(TP-1)
N00831: C20.1(TP-1) R14.1(TP-1)
N00835: C24.1(TP-1) R13.1(TP-1)
N00837: C7.1(TP-1) R7.1(TP-1)
N04966: L3.1(TP-1) L5.1(TP-1)
N05690: U2.12(TP-12) U17.19(TP-19)
N05692: U2.18(TP-18) U17.13(TP-13)
N05694: U2.13(TP-13) U17.18(TP-18)
N05696: U2.19(TP-19) U17.12(TP-12)
N05698: U2.17(TP-17) U17.14(TP-14)
N05700: U2.14(TP-14) U17.17(TP-17)
N05702: U2.15(TP-15) U17.16(TP-16)
N05704: U2.16(TP-16) U17.15(TP-15)
N11940: U1.13(TP-13) U15.18(TP-18)
N11950: U1.14(TP-14) U15.17(TP-17)
N11984: U1.17(TP-17) U15.14(TP-14)
N11994: U1.18(TP-18) U15.13(TP-13)
N12004: U1.19(TP-19) U15.12(TP-12)
N19706: R1.1(TP-1) U14.18(TP-18)
N19710: R2.1(TP-1) U14.16(TP-16)
N19714: R17.1(TP-1) U14.14(TP-14)
N19718: R12.1(TP-1) U14.12(TP-12)
N19934: D4.2(TP-2) R12.2(TP-2)
N19938: D3.2(TP-2) R17.2(TP-2)
N19942: D1.2(TP-2) R2.2(TP-2)
N23417: U10.6(TP-6) U13.6(TP-6) U16.48(TP-48)
N23878: R11.1(TP-1) U16.36(TP-36)
N24816: U16.14(TP-14) U18.1(TP-1)
N24821: U16.10(TP-10) U18.2(TP-2)
N24826: U16.11(TP-11) U18.3(TP-3) U18.4(TP-4)
N84247: U19.9(TP-9) U20.22(TP-22) U21.9(TP-9) U21.12(TP-12)
N103899: U19.8(TP-8) U19.12(TP-12) U20.19(TP-19) U20.23(TP-23) U21.8(TP-8) U21.11(TP-11)
N255822: D2.2(TP-2) R1.2(TP-2)
N314771: U3.6(TP-6) U4.6(TP-6) U16.51(TP-51)
N315146: U9.6(TP-6) U11.6(TP-6) U16.50(TP-50)
N315333: U8.6(TP-6) U12.6(TP-6) U16.49(TP-49)
N320476: U3.11(TP-11) U4.11(TP-11) U8.11(TP-11) U9.11(TP-11) U10.11(TP-11) U11.11(TP-11) U12.11(TP-11) U13.11(TP-11) U16.57(TP-57)
N336036: C23.1(TP-1) J2.1(TP-1) L1.2(TP-2)
N336041: C18.1(TP-1) J3.1(TP-1) L4.2(TP-2)

Pads without a net: J1 12 48 49 65 66; J2 3 4; J3 3 4; MTH1 1; MTH2 1; MTH3 1; U3 1 8 9 12 13 16 17 24 25; U4 1 8 9 12 13 16 17 24 25; U7 7; U8 1 8 9 12 13 16 17 24 25; U9 1 8 9 12 13 16 17 24 25; U10 1 8 9 12 13 16 17 24 25; U11 1 8 9 12 13 16 17 24 25; U12 1 8 9 12 13 16 17 24 25; U13 1 8 9 12 13 16 17 24 25; U14 13 15 17 19; U16 5 26 27 32 35 37 38 47 55 59 68; U18 5 6 7 8; U19 11; U20 20; U22 1 5 8; U23 1 5 8; U25 1 2 3 4 5 6 7 8 9 11 12 13 14 15 16 17 18 19

## Via types
v1: diameter 0.61, hole 0.33, TOP to BOTTOM, 302 vias
v2: diameter 1.016, hole 0.457, TOP to BOTTOM, 247 vias

## Routing (per net, layer and track width the routed paths; a pad name or vN(x,y) marks a point on that pad's centre or on a via; arc(x,y) is an arc through that point)
AGND: length 38.4
  TOP w0.381: v2(110.07,35.56) U5.3 ; U6.3 v2(110.07,13.97) ; v2(84.67,17.78) U1.7 ; v2(84.67,38.73) U2.10 ; U1.3 v2(84.67,12.7) ; 82.55,34.92 v2(84.67,34.92) ; U2.3 v2(84.67,29.84) ; v2(84.67,21.59) U1.10
  GND w0.381: J1.33 12.55,17.78 ; J1.33 11.43,18.9 ; J1.33 10.31,17.78 ; J1.33 11.43,16.66 ; J1.1 6.35,18.9 ; J1.1 7.47,17.78 ; J1.1 5.23,17.78 ; J1.1 6.35,16.66 ; J1.2 7.47,20.32 ; J1.2 5.23,20.32 ; J1.2 6.35,19.2 ; J1.2 6.35,21.44
  BOTTOM w0.381: C21.2 v2(78.11,20.11) ; C1.2 107.44,31.45 v2(107.53,31.54) ; C22.2 80.12,31.22 v2(80.22,31.12) ; C6.2 106.81,9.23 v2(106.89,9.31)
GND: length 421.2
  TOP w0.381: v2(18.84,25.4) J1.36 J1.35 ; v2(18.84,25.4) 19.47,24.77 v1(19.68,24.77) ; v2(18.84,25.4) U20.45 22.86,25.4 22.86,29.21 U20.39 ; U21.1 v2(32.6,48.26) ; U19.28 v2(18.84,84.45) ; v1(58.42,26.03) 59.05,26.03 59.05,26.67 57.78,27.94 57.78,38.1 57.15,38.73 U17.1 ; v1(80.01,10.79) v1(74.3,10.79) 73.66,10.16 U1.20 v2(70.91,10.16) 69.85,10.16 67.94,8.25 v1(57.78,8.25) ; v1(33.66,32.38) v2(32.6,32.38) U20.15 32.6,34.5 v2(32.6,36.2) 30.69,36.2 ; v2(18.84,71.75) U19.48 ; U20.39 U20.34 ; U20.39 v2(18.84,29.21) ; v2(32.6,25.4) 38.24,25.4 38.87,26.03 U7.12 ; v2(32.6,25.4) 28.57,21.38 v2(23.92,21.38) 19.26,21.38 19.05,21.59 v1(19.05,23.49) ; v2(32.6,25.4) U20.4 ; v2(32.6,77.47) U19.10 ; v2(54.4,27.3) 53.97,26.88 v1(53.97,26.03) ; v2(54.4,27.3) 55.17,26.53 55.38,26.53 v1(55.88,26.03) ; v2(54.4,27.3) v2(54.4,21.59) ; v2(54.4,27.3) U17.10 ; U20.10 v1(31.11,29.21) v2(32.6,29.21) v1(34.29,29.21) ; J1.35 J1.34 ; J1.35 J1.3 ; U20.34 21.08,34.16 19.05,36.2 ; U20.34 v2(18.84,32.38) ; v2(50.38,73.02) U25.10 ; 109.22,69.16 109.43,68.95 v2(109.43,66.04) ; 109.22,69.16 v2(109.22,70.06) 110.49,71.33 110.49,77.47 109.43,78.53 v2(109.43,80.01) ; 109.22,69.16 U11.27 ; U13.27 v2(85.09,98) ; U7.12 U7.13 52.7,26.03 v1(53.34,25.4) ; U7.12 40,24.9 40.43,24.48 v2(40.43,23.28) ; U7.12 U7.11 ; v2(18.84,73.66) U19.45 ; v2(32.6,57.15) U21.15 ; v2(32.6,50.16) U21.4 ; v2(68.58,108.16) 68.5,108.08 U16.74 ; v2(54.4,21.59) U15.1 ; v2(54.4,21.59) 55.03,20.95 57.15,20.95 56.52,20.32 U15.10 v2(54.4,10.16) 55.25,9.31 v1(55.25,8.89) ; v2(32.6,53.98) 30.48,53.98 ; v2(32.6,60.96) U21.21 ; v2(32.6,73.66) U19.4 ; v2(54.4,44.45) U14.10 U17.1 ; 21.08,53.98 v2(18.84,53.98) ; U16.75 v2(64.77,111.97) ; U21.48 v2(18.84,48.26) ; U17.1 v2(54.4,38.73) ; U14.1 v2(54.4,55.88) ; 30.69,36.2 v2(32.6,38.1) U20.24 ; 30.69,36.2 U20.21 ; U21.45 v2(18.84,50.16) ; U10.27 v2(109.22,84.03) ; U16.17 35.64,101.73 v2(35.56,101.81) ; U19.39 v2(18.84,77.47) ; v2(64.77,78.95) U16.53 ; 19.05,36.2 U20.28 U20.25 v2(18.84,38.1) 18.84,39.16 v1(20.32,40.64) ; 19.05,36.2 v2(18.84,36.2) ; v2(38.73,8.89) v1(36.83,8.89) ; v1(20.95,41.91) 20.95,43.18 v2(23.92,46.14) ; v2(70.91,27.3) 71.12,27.3 ; 71.12,27.3 U2.20 ; 71.12,27.3 71.75,27.94 76.2,27.94 76.84,28.58 76.84,26.67 78.11,25.4 82.76,25.4 v2(84.67,27.3) U2.1 ; v2(85.09,84.03) U8.27 ; U12.27 v2(85.09,70.06) ; v2(85.09,111.97) U9.27 ; v2(32.6,80.64) U19.15 ; U21.28 v2(18.84,60.96) ; v1(83.19,8.89) 83.68,9.39 83.89,9.39 v2(84.67,10.16) U1.1 ; v2(109.22,98) U3.27 ; U21.34 v2(18.84,57.15) ; U19.34 v2(18.84,80.64) ; U19.1 v2(32.6,71.75) ; v2(109.22,111.97) U4.27 ; v2(32.6,84.45) U19.21 ; v2(74.3,22.65) v1(74.3,17.78)
  BOTTOM w0.381: v2(38.73,19.05) 40.41,17.37 C20.2 v2(38.73,16.51) 40.41,14.83 C17.2 v2(38.73,13.97) v2(38.73,11.43) ; v2(38.73,19.05) 40.41,20.73 C7.2 40.41,23.27 v2(40.43,23.28) ; v2(38.73,19.05) C24.2 ; v2(38.73,11.43) C16.2 ; v2(38.73,11.43) 40.41,9.75 C8.2 v2(38.73,8.89) ; v1(83.19,8.89) 81.28,10.79 v1(80.01,10.79) ; C10.2 24,68.92 v2(23.92,69) ; v1(53.34,25.4) v1(53.97,26.03) ; 85.22,67.95 85.22,66.98 85.3,66.89 v2(85.3,66.04) ; v2(38.73,6.35) 37.33,7.76 37.33,8.39 v1(36.83,8.89) ; v2(38.73,6.35) 38.73,3.81 C19.2 ; v2(38.73,6.35) C5.2 ; C11.2 24,46.06 v2(23.92,46.14) ; v2(109.43,66.04) 109.43,66.89 109.35,66.98 C14.2 ; C13.2 109.35,94.92 109.43,94.83 v2(109.43,93.98) ; v2(70.91,27.3) 71.97,26.25 71.97,22.65 v2(74.3,22.65) 74.4,22.75 C2.2 ; v2(85.3,93.98) 85.3,94.83 85.22,94.92 85.22,95.89 ; C4.2 109.35,108.89 109.43,108.8 v2(109.43,107.95) ; v2(23.92,21.38) 24,21.29 C15.2 ; v1(57.78,8.25) 55.88,8.25 v1(55.25,8.89) ; v2(32.6,25.4) 31.11,25.4 30.48,26.03 30.48,28.58 v1(31.11,29.21) ; C9.2 24,91.14 v2(23.92,91.23) ; C12.2 109.35,80.95 109.43,80.86 v2(109.43,80.01) ; C3.2 70.91,7.62 v2(70.91,10.16) ; v1(34.29,29.21) 33.66,29.84 v1(33.66,32.38) ; v2(85.94,107.95) 85.94,108.8 85.85,108.89 C25.2 ; v1(20.95,41.91) 20.95,41.27 v1(20.32,40.64) ; v1(19.05,23.49) 19.68,24.13 v1(19.68,24.77) ; v1(58.42,26.03) v1(55.88,26.03) ; 85.22,81.91 85.22,80.95 85.3,80.86 v2(85.3,80.01) ; v1(74.3,17.78) v1(74.3,10.79)
GND_EARTH: length 31.1
  BOTTOM w0.381: J2.2 113.03,19.26 v2(117.9,24.13) C23.2 117.06,26.03 117.26,26.03 v2(117.9,26.67) ; J3.2 114.3,36.83 114.3,30.27 v2(117.9,26.67) ; C18.2 v2(117.9,26.67)
V12N: length 312.4
  TOP w0.381: v1(92.71,29.84) 92.08,29.21 92.08,22.86 95.89,19.05 98.42,19.05 99.7,17.78 99.7,15.24 v1(98.42,13.97) 98.42,16.71 95.54,19.6 92.92,19.6 91.9,18.58 91.41,18.58 91,18.17 91,17.88 91.2,17.68 U23.4 ; v1(101.6,33.66) 102.23,34.29 U5.7 ; U22.4 93.75,35.79 v1(93.75,34.92) ; v1(3.49,92.39) 4.76,92.39 J1.31 ; v1(98.42,31.75) v1(100.33,31.75) ; v1(100.97,28.58) 100.97,24.13 v1(101.6,23.49) ; v1(94.62,34.92) 95.11,35.42 95.11,36.36 94.56,36.92 93.49,36.92 92.8,37.61 92.8,38.59 93.64,39.43 95.54,39.43 98.11,36.87 98.11,35.33 98.51,34.92 99.06,34.92 v1(100.33,33.66) ; v1(91.44,19.69) 90.52,19.69 90.46,19.62 v1(87.69,19.62) ; v1(87,6.35) 86.36,6.99 86.36,11.24 86.83,11.71 86.83,14.49 86.36,14.96 v1(86.36,19.05) ; v1(95.25,20.95) 96.52,22.23 v1(96.52,23.49) ; v1(100.97,12.7) U6.7
  BOTTOM w0.381: v1(87.69,19.62) 86.93,19.62 v1(86.36,19.05) ; v1(100.33,33.66) v1(101.6,33.66) ; v1(100.97,12.7) 99.7,13.97 v1(98.42,13.97) ; v1(101.6,23.49) v1(96.52,23.49) ; v1(100.97,28.58) 102.23,29.84 102.23,31.12 101.6,31.75 v1(100.33,31.75) ; v1(91.44,19.69) 92.71,20.95 v1(95.25,20.95) ; v1(92.71,29.84) 90.26,32.3 90.26,36.05 90.95,36.74 91.93,36.74 v1(93.75,34.92) ; v1(98.42,31.75) 97.6,32.58 95.21,32.58 94.47,31.84 93.49,31.84 92.8,32.53 92.8,33.51 93.49,34.2 94.47,34.2 94.6,34.07 94.76,34.23 94.9,34.23 95.31,34.64 95.31,35.21 94.9,35.62 94.33,35.62 93.75,35.04 v1(93.75,34.92) ; v1(87,6.35) 87,2.54 85.09,0.63 34.29,0.63 33.02,1.91 27.3,1.91 22.23,6.99 9.52,6.99 5.6,10.91 5.6,13.44 4.55,14.49 3.06,14.49 2.79,14.22 2.25,14.22 1.2,15.27 1.2,15.8 3.17,17.78 3.17,26.03 2.48,26.73 2.48,91.38 v1(3.49,92.39) ; v1(93.75,34.92) v1(94.62,34.92)
VCC: length 289.2
  TOP w0.381: v1(85.73,14.61) 85.73,19.26 v2(84.67,20.32) U1.9 81.92,20.32 v1(79.38,22.86) 75.36,22.86 74.67,23.55 70.12,23.55 v2(68.16,21.59) ; v1(22.86,34.29) U20.31 19.89,34.29 19.85,34.25 19.84,34.25 19.62,34.03 19.36,34.29 v2(18.84,34.29) ; U19.18 v2(32.6,82.55) ; v2(84.67,37.46) 81.06,37.46 v1(80.64,37.05) ; v2(63.5,78.95) U16.52 ; v2(18.84,52.07) U21.42 22.28,52.07 22.67,52.46 22.67,58.67 22.32,59.02 19.84,59.02 19.49,58.67 19.49,58.4 v2(18.84,59.05) U21.31 ; v2(68.16,21.59) 68.16,22.49 68.58,22.92 v1(68.58,24.13) ; v2(68.16,21.59) U15.20 ; U16.16 35.64,103 v2(35.56,103.08) ; v2(79.38,26.88) 80.86,26.88 81.06,27.09 81.06,27.77 81.26,27.98 81.26,28.08 81.76,28.58 U2.2 v2(84.67,28.58) 85.09,28.58 v1(85.73,29.21) ; 65.68,55.88 v2(67.1,55.88) ; 65.68,55.88 U14.20 ; 65.68,55.88 66.18,55.38 66.18,55.1 65.97,55.31 63.82,55.31 63.41,54.9 63.41,44.16 63.82,43.75 65.97,43.75 66.04,43.82 U17.20 v2(68.16,38.73) v1(69.22,38.73) ; L6.1 86.57,2.54 v2(79.38,9.74) 80.86,9.74 81.06,9.94 81.06,10.63 81.26,10.83 81.26,10.93 81.76,11.43 U1.2 v2(84.67,11.43) 84.67,11.43 85.73,12.48 v1(85.73,12.7) ; U21.18 v2(32.6,59.05) ; v2(18.84,75.56) U19.42 ; v2(32.6,27.3) U20.7 v1(29.9,27.3) 29.28,27.3 27.3,25.33 v2(27.3,21.38) ; v2(18.84,27.3) U20.42 v1(22.28,27.3) v1(22.86,27.3) ; v2(32.6,34.29) U20.18 ; v2(68.58,105.62) 68.5,105.54 66.55,105.54 ; U25.20 v2(37.68,61.59) ; v2(58.42,111.97) U16.80 ; U19.31 v2(18.84,82.55) ; D3.1 108.59,43.81 108.97,43.43 115.82,43.43 116.2,43.81 116.2,44.45 D4.1 ; U19.7 v2(32.6,75.56) ; U21.7 v2(32.6,52.07)
  BOTTOM w0.381: 106.05,50.8 106.05,59.97 106.11,60.04 106.11,66.72 106.05,66.79 C14.1 v2(106.05,69.64) ; 106.05,50.8 D1.1 99.78,51.98 97.93,51.98 97.25,51.3 95.39,51.3 D2.1 ; 106.05,50.8 D3.1 ; v2(82.55,111.76) C25.1 ; v1(22.28,27.3) 22.28,33.71 v1(22.86,34.29) ; v2(27.3,91.23) C9.1 ; C3.1 v2(79.38,9.74) ; v2(79.38,26.88) C2.1 v1(79.38,22.86) ; v2(81.92,83.61) C27.1 ; v2(106.05,83.61) C12.1 ; C26.1 v2(81.92,97.58) ; v2(27.3,21.38) C15.1 ; v1(80.64,37.05) 86.36,31.33 86.36,29.59 85.98,29.21 v1(85.73,29.21) ; v2(106.05,111.55) C4.1 ; v2(27.3,46.14) C11.1 ; v2(27.3,69) C10.1 ; v2(106.05,97.58) C13.1 ; v2(84.67,28.58) 88.9,28.58 L2.1 ; v1(22.86,27.3) v1(29.9,27.3) ; v1(69.22,38.73) 69.22,24.77 v1(68.58,24.13) ; v1(85.73,12.7) v1(85.73,14.61) ; v2(32.6,27.3) 35.18,27.3 35.56,27.69 35.56,33.91 35.18,34.29 v2(32.6,34.29) ; C28.1 v2(81.92,69.64)
A0: length 10.2
  TOP w0.203: J1.54 17.05,71.12 18.37,72.44 19.3,72.44 19.35,72.39 U19.47
A1: length 10.1
  TOP w0.203: U19.46 19.35,73.02 19.18,72.85 17.96,72.85 17.14,73.66 J1.55
A2: length 10.5
  TOP w0.203: U19.44 19.35,74.3 19.3,74.35 18.37,74.35 18.32,74.3 17.14,74.3 15.24,76.2 J1.56
A3: length 12.7
  TOP w0.203: J1.57 15.67,78.74 15.88,78.54 15.88,76.2 17.32,74.75 19.18,74.75 19.35,74.93 U19.43
A4: length 13.9
  TOP w0.203: U19.41 19.58,76.2 19.54,76.25 19.31,76.25 19.3,76.25 18.37,76.25 18.37,76.25 17.73,76.25 16.51,77.47 16.51,81.08 16.31,81.28 J1.58
A5: length 16.3
  TOP w0.203: J1.59 16.94,83.82 17.14,83.62 17.14,77.47 17.96,76.66 19.18,76.66 19.35,76.83 U19.40
A6: length 16.4
  TOP w0.203: J1.60 16.94,86.36 17.62,85.68 17.62,80.14 18.41,79.34 18.41,79.27 19.58,78.11 U19.38
A7: length 18.8
  TOP w0.203: J1.61 17.78,88.9 18.03,88.65 18.03,80.31 18.5,79.83 18.62,79.83 18.82,79.63 18.82,79.5 19.58,78.74 U19.37
A8: length 16.5
  TOP w0.203: U21.47 19.35,48.89 19.18,49.07 18.5,49.07 18.03,48.6 18.03,47.81 17.39,47.17 7.44,47.17 J1.13
A9: length 15.5
  TOP w0.203: U21.46 19.35,49.53 19.3,49.48 18.37,49.48 18.32,49.53 12.28,49.53 12.05,49.3 10.81,49.3 10.58,49.53 7.62,49.53 J1.14
A10: length 17
  TOP w0.203: J1.15 8.89,50.8 10.13,50.8 10.34,50.6 10.34,50.35 10.98,49.71 11.88,49.71 12.57,50.39 17.92,50.39 18.5,50.98 19.18,50.98 19.35,50.8 U21.44
A11: length 17.8
  TOP w0.203: U21.43 19.58,51.43 19.53,51.38 18.33,51.38 17.75,50.8 12.98,50.8 11.88,51.89 9.27,51.89 8.89,52.27 8.89,52.35 6.63,54.61 6.53,54.61 6.35,54.79 J1.16
A12: length 18.4
  TOP w0.203: J1.17 6.35,57.15 6.53,56.97 6.8,56.97 8.89,54.89 8.89,54.81 9.09,54.61 12.7,54.61 14.15,53.16 15.01,52.3 17.92,52.3 18.5,52.88 19.18,52.88 19.35,52.7 U21.41
A13: length 18.6
  TOP w0.203: U21.40 21.03,53.29 18.33,53.29 17.75,52.7 16.15,52.7 11.88,56.97 11.33,56.97 10.34,57.97 10.34,58.24 7.62,60.96 J1.18
A14: length 19.6
  TOP w0.203: U21.38 19.35,54.61 19.18,54.79 18.5,54.79 18.32,54.61 15.3,54.61 13.33,56.57 13.33,58.06 11.88,59.51 11.33,59.51 10.34,60.51 10.34,60.78 7.62,63.5 J1.19
A15: length 21.4
  TOP w0.203: U21.37 15.24,55.24 13.97,56.52 13.97,59.97 11.88,62.05 11.33,62.05 10.34,63.05 10.34,63.32 7.62,66.04 J1.20
A16: length 11.6
  TOP w0.203: U20.36 19.58,31.12 19.56,31.09 18.8,31.09 18.44,30.73 18.44,30.23 18.24,30.02 13.51,30.02 13.11,29.62 13.11,29.04 12.87,28.8 12.29,28.8 J1.37
A17: length 10.2
  TOP w0.203: J1.38 17.61,30.48 18.63,31.5 19.33,31.5 19.58,31.75 U20.35
A18: length 32.7
  TOP w0.203: v1(29.84,38.73) 31.11,40 v1(33.02,40) ; v1(38.73,40.64) 38.73,41.05 38.96,41.27 U7.6 ; U20.33 19.35,33.02 19.18,33.2 18.5,33.2 17.28,31.98 15.07,31.98 14.03,33.02 J1.39 ; v1(23.49,33.02) v1(21.58,33.02)
  BOTTOM w0.203: v1(29.84,38.73) 29.21,38.73 v1(23.49,33.02) ; v1(38.73,40.64) 33.66,40.64 v1(33.02,40)
A19: length 10.8
  TOP w0.203: U20.32 19.95,33.66 19.72,33.43 19.53,33.43 19.33,33.63 19.18,33.48 18.5,33.48 18.3,33.68 17.53,33.68 17.32,33.88 14.08,33.88 13.18,34.79 12.2,34.79 J1.40
A20: length 11.6
  TOP w0.203: U20.30 21.02,34.92 20.92,35.03 19.93,35.03 19.63,34.73 19.38,34.98 18.33,34.98 17.62,35.69 17.62,36.36 15.88,38.1 J1.41
A21: length 14.5
  TOP w0.203: J1.42 16,40.64 17.62,39.02 17.62,37.59 18.03,37.19 18.03,35.86 18.5,35.38 19.18,35.38 19.65,35.86 19.65,35.92 19.69,35.88 19.58,35.77 19.58,35.35 19.63,35.3 19.76,35.43 20.95,35.43 U20.29
A22: length 13.5
  TOP w0.203: U20.27 20.01,36.83 19.55,37.29 18.5,37.29 18.03,37.76 18.03,39.89 14.73,43.18 J1.43
A23: length 16.8
  TOP w0.203: J1.44 15.94,45.72 22.58,39.08 22.58,37.89 22.16,37.46 U20.26
AEN/: length 49.7
  BOTTOM w0.203: U7.8 38.62,36.2 36.2,38.62 36.2,39.22 37.01,40.03 40.23,40.03 41.05,40.84 41.05,41.71 40.44,42.32 39.55,42.32 38.28,41.05 37.01,41.05 36.2,41.86 36.2,42.34 35.99,42.55 23.38,42.55 18.12,47.8 17.6,47.8 15.88,49.53 15.88,53.14 15.67,53.34 J1.47
BA0: length 25.8
  TOP w0.203: U21.2 32.08,48.89 32.26,49.07 32.93,49.07 32.96,49.05 33.76,49.05 33.93,48.87 34.47,48.87 34.82,48.51 34.82,48.01 34.62,47.8 34.62,38.96 34.63,38.95 34.63,35.35 34.62,35.34 34.62,34.5 34.42,34.3 34.42,31.65 33.88,31.12 U20.13
BA1: length 25.3
  TOP w0.203: v1(34.21,49.45) 33.04,49.45 33.1,49.48 32.09,49.48 32.04,49.53 U21.3 ; v1(34.21,48.26) 34.21,38.79 34.22,38.78 34.22,35.52 34.21,35.51 34.21,34.67 34.01,34.47 34.01,31.82 33.76,31.57 32.26,31.57 32.08,31.75 U20.14
  BOTTOM w0.203: v1(34.21,48.26) v1(34.21,49.45)
BA2: length 24.3
  TOP w0.203: v1(33.6,46.94) 33.6,38.82 33.82,38.61 33.82,37.59 33.6,37.38 33.6,36.91 33.82,36.7 33.82,35.69 33.6,35.48 33.6,33.66 33.15,33.2 32.26,33.2 32.08,33.02 U20.16 ; v1(33.6,50.75) 33.17,51.18 32.46,51.18 32.08,50.8 U21.5
  BOTTOM w0.203: v1(33.6,46.94) v1(33.6,50.75)
BA3: length 21.5
  TOP w0.203: U21.6 28.98,51.43 28.17,50.62 28.17,34.47 28.98,33.66 U20.17
BD8: length 51.7
  TOP w0.203: U21.23 35.89,62.23 38.1,60.02 v1(38.1,31.75)
  BOTTOM w0.203: v1(30.48,24.13) 37.47,24.13 38.1,24.77 v1(38.1,31.75)
BD9: length 50.4
  TOP w0.203: U21.22 32.08,61.59 32.26,61.77 35.77,61.77 37.47,60.08 37.47,49.91 37.67,49.71 37.67,46.81 37.47,46.61 37.47,40.15 37.47,40.14 37.47,34.16 37.47,34.15 v1(37.47,33.02)
  BOTTOM w0.203: v1(37.47,33.02) 37.47,24.77 37.29,24.59 32.26,24.59 32.08,24.77 v1(30.48,24.77)
BD10: length 47.8
  TOP w0.203: U21.20 32.08,60.32 32.26,60.15 32.93,60.15 33.65,60.87 36.1,60.87 37.06,59.91 37.06,49.74 37.26,49.54 37.26,46.98 37.06,46.78 37.06,39.98 37.07,39.97 37.07,34.33 37.06,34.32 37.06,33.48 36.86,33.27 36.86,32.77 37.13,32.49 37.13,26.97 36.2,26.03 33.11,26.03 32.93,26.21 32.26,26.21 32.08,26.03 U20.5
BD11: length 45.1
  TOP w0.203: U21.19 31.98,59.69 32.03,59.74 33.64,59.74 33.69,59.69 35.99,59.69 36.65,59.03 36.65,49.57 36.86,49.36 36.86,47.16 36.65,46.95 36.65,39.81 36.66,39.8 36.66,34.5 36.65,34.49 36.65,33.65 36.45,33.44 36.45,32.6 36.73,32.32 36.73,27.37 36.32,26.96 36.2,26.87 35.99,26.67 33.11,26.67 33.06,26.62 32.13,26.62 32.08,26.67 U20.6
BD12: length 43.5
  TOP w0.203: U21.17 32.08,58.42 32.26,58.24 32.93,58.24 33.75,59.05 35.36,59.05 36.25,58.17 36.25,49.4 36.45,49.19 36.45,47.33 36.25,47.12 36.25,39.64 36.25,39.63 36.25,34.67 36.25,34.66 36.25,33.82 36.04,33.61 36.04,32.43 36.32,32.15 36.32,28.21 35.92,27.81 35.74,27.69 35.36,27.3 33.75,27.3 32.93,28.12 32.26,28.12 32.08,27.94 U20.8
BD13: length 39.1
  TOP w0.203: 30.48,28.58 32.08,28.58 32.13,28.52 33.06,28.52 33.11,28.58 34.72,28.58 35.33,29.19 35.51,29.3 35.92,29.71 35.92,31.98 35.64,32.26 35.64,33.78 35.84,33.99 35.84,34.83 35.85,34.84 35.85,39.46 35.84,39.47 35.84,47.29 36.04,47.5 36.04,49.02 35.84,49.23 35.84,56.67 34.72,57.78 33.11,57.78 33.06,57.84 32.13,57.84 32.08,57.78 U21.16
BD14: length 36.2
  TOP w0.203: U20.11 32.08,29.84 32.26,30.02 32.93,30.02 33.11,29.84 34.29,29.84 34.47,29.96 35.51,31 35.51,31.81 35.23,32.09 35.23,33.95 35.43,34.16 35.43,35 35.44,35.01 35.44,39.29 35.43,39.3 35.43,47.46 35.64,47.67 35.64,48.85 35.43,49.06 35.43,55.8 34.72,56.52 33.11,56.52 32.93,56.34 32.26,56.34 32.08,56.52 U21.14
BD15: length 33.5
  TOP w0.203: U21.13 34.09,55.88 35.03,54.94 35.03,48.89 35.23,48.68 35.23,47.84 35.03,47.63 35.03,39.13 35.03,39.12 35.03,35.18 35.03,35.17 35.03,34.33 34.82,34.12 34.82,31.36 33.95,30.48 U20.12
D6: length 98.5
  TOP w0.203: U20.47 v1(18.41,24.13) 18.41,20.32 17.32,19.23 10.98,19.23 10.52,19.69 7.26,19.69 6.8,19.23 1.73,19.23 0,20.95 0,55.24 1.9,57.15 v1(3.17,57.15) ; v1(15.88,56.52) 18.32,56.52 18.5,56.34 19.18,56.34 19.35,56.52 U21.35
  BOTTOM w0.203: v1(18.41,24.13) 13.33,24.13 12.52,23.32 12.52,22.41 11.88,21.77 10.98,21.77 10.34,22.41 10.34,23.09 9.3,24.13 7.62,24.13 J1.4 ; v1(15.88,56.52) 15.24,57.15 v1(3.17,57.15)
D9: length 22.5
  TOP w0.203: v1(12.7,24.77) v1(17.14,24.77) ; J1.5 v1(9.52,24.77) ; v1(23.49,24.77) U20.46
  BOTTOM w0.203: v1(23.49,24.77) 22.05,26.21 18.5,26.21 18.03,25.74 18.03,25.65 v1(17.14,24.77) ; v1(9.52,24.77) 9.98,24.31 12.24,24.31 v1(12.7,24.77)
D10: length 17
  TOP w0.203: J1.6 7.62,30.48 10.34,27.76 10.34,27.49 11.33,26.49 15.19,26.49 15.62,26.06 16.13,26.06 16.28,26.21 19.18,26.21 19.3,26.09 19.35,26.09 19.52,26.26 19.78,26.26 19.88,26.16 20.95,26.16 U20.44
D11: length 18.3
  TOP w0.203: U20.43 19.35,26.67 19.3,26.62 18.37,26.62 18.32,26.67 v1(15.88,26.67) ; J1.7 8.89,33.02 10.34,31.57 10.34,30.03 11.15,29.21 v1(12.7,29.21)
  BOTTOM w0.203: v1(12.7,29.21) 13.33,29.21 v1(15.88,26.67)
D12: length 19.5
  TOP w0.203: U20.41 19.35,27.94 19.18,28.12 14.78,28.12 v1(13.97,27.3)
  BOTTOM w0.203: J1.8 10.34,31.57 10.34,30.03 10.98,29.39 11.89,29.39 v1(13.97,27.3)
D13: length 20.6
  TOP w0.203: v1(13.33,31.12) 12.7,31.75 10.79,31.75 7.44,35.1 7.44,37.01 J1.9 ; v1(14.6,28.58) 18.32,28.58 18.37,28.52 19.3,28.52 19.35,28.58 21.08,28.58
  BOTTOM w0.203: v1(13.33,31.12) 13.33,29.84 v1(14.6,28.58)
D14: length 20.1
  TOP w0.203: J1.10 10.34,36.65 10.34,35.11 11.15,34.29 13.09,34.29 13.91,33.48 14.15,33.48 v1(15.24,32.38) ; v1(19.05,30.48) 19.68,29.84 U20.38
  BOTTOM w0.203: v1(15.24,32.38) 17.14,32.38 17.62,31.91 17.62,31.88 18.33,31.17 18.36,31.17 v1(19.05,30.48)
D15: length 22.4
  TOP w0.203: v1(17.78,34.29) 14.25,34.29 11.88,36.65 11.33,36.65 10.34,37.65 10.34,38.2 6.8,41.73 6.53,41.73 6.35,41.91 J1.11 ; v1(19.68,30.48) U20.37
  BOTTOM w0.203: v1(17.78,34.29) 17.78,32.38 18.03,32.14 18.03,32.05 18.5,31.57 18.82,31.57 19.68,30.71 v1(19.68,30.48)
DDIR: length 39
  TOP w0.203: U20.1 v1(39.37,23.49) ; v1(49.56,41.27) U7.19
  BOTTOM w0.203: v1(49.56,41.27) 49.99,40.84 49.99,24.65 49.07,23.72 41.14,23.72 40.77,24.1 39.97,24.1 v1(39.37,23.49)
DEN/: length 120.9
  TOP w0.203: v1(48.89,43.81) U7.20 ; U20.48 21.59,23.49 ; 21.59,23.49 23.09,23.49 24.73,25.14 24.73,46.48 24.13,47.08 24.13,64.77 25.4,66.04 25.4,86.16 25.2,86.36 U19.25 ; 21.59,23.49 v1(22.23,22.86)
  BOTTOM w0.203: v1(22.23,22.86) 37.47,22.86 39.11,24.5 40.94,24.5 41.31,24.13 48.89,24.13 49.53,24.77 49.53,40.44 48.95,41.02 48.95,41.53 49.53,42.11 49.53,43.18 v1(48.89,43.81)
GAIN: length 309.1
  TOP w0.203: v1(91.44,12.7) v1(91.44,10.79) ; v1(36.2,87.63) 37.47,87.63 U16.28 ; U5.6 102.1,35.56 100.99,34.46 100.99,29.12 103.3,26.81 103.37,26.81 104.14,26.03 v1(104.14,20.95) ; v1(95.25,29.21) 95.25,31.12 100.13,31.12 100.33,30.91 100.33,22.86 v1(101.6,21.59) ; v1(104.78,14.61) 104.78,14.27 104.47,13.97 U6.6
  BOTTOM w0.203: v1(91.44,10.79) 91.44,3.81 91.14,3.51 89.77,3.51 89.2,2.94 89.2,1.57 85.73,-1.91 32.45,-1.91 33.32,-1.03 33.32,-0.24 32.78,0.3 27,0.3 21.4,5.91 5.73,5.91 1.27,10.36 1.27,13.67 0.12,14.82 0.12,93.46 3.17,96.52 4.44,96.52 5.71,97.79 12.06,97.79 13.33,96.52 13.33,92.71 17.58,88.47 28.19,88.47 29.26,89.53 34.29,89.53 v1(36.2,87.63) ; v1(95.25,29.21) 95.25,19.76 97.61,17.4 97.61,15.42 96.88,14.68 96.88,13.62 96.24,12.98 95.17,12.98 94.43,12.24 93.53,12.24 92.89,12.88 91.62,12.88 v1(91.44,12.7) ; v1(104.78,14.61) 104.78,16.71 105.08,17.02 105.08,20.02 v1(104.14,20.95) 102.23,20.95 v1(101.6,21.59)
MRD/: length 43.9
  BOTTOM w0.203: J1.46 15.04,50.8 15.24,50.6 15.24,49.53 17.37,47.4 17.95,47.4 23.44,41.91 35.36,41.91 35.56,41.71 34.9,41.05 33.48,41.05 32.61,40.17 32.61,39.84 32.85,39.6 33.19,39.6 33.83,40.23 35.1,40.23 35.56,39.77 35.56,38.68 38.51,35.73 38.51,35.15 U7.9
MWR/: length 39.4
  BOTTOM w0.203: U7.10 38.1,33.02 38.1,35.56 34.92,38.73 33.14,38.73 32.2,39.67 32.2,40.34 33.14,41.27 23.49,41.27 17.78,46.99 17.14,46.99 15.88,48.26 J1.45
N00036_6360: length 67.3
  TOP w0.203: v1(84.45,15.24) U1.5 81.76,15.24 81.15,15.85 81.15,18.44 81.76,19.05 U1.8 ; U6.5 102.1,15.24 100.33,13.47 v1(100.33,12.07) v1(100.33,2.54) L6.2
  BOTTOM w0.203: R3.1 99.26,17.78 99.06,17.58 99.06,15.88 97.3,14.11 97.3,13.83 98.42,12.7 99.7,12.7 v1(100.33,12.07) 94.83,12.07 94.6,11.84 90.4,11.84 87,15.24 v1(84.45,15.24) ; v1(100.33,2.54) 100.33,10.79 R4.1
N00038_6372: length 31.8
  TOP w0.203: v1(80.64,13.34) 81.92,13.34 U1.4 ; U1.4 83.95,13.97 84.11,14.13 85.16,14.13 86.33,12.95 86.33,12.2 85.86,11.73 85.86,5.51 88.06,3.31 88.47,3.31 88.76,3.6 88.76,9.76 90.17,8.35 L3.2 ; U1.4 81.76,13.97
  BOTTOM w0.203: C21.1 80.01,12.7 v1(80.64,13.34)
N00044_6366: length 39.6
  TOP w0.203: U23.2 93.27,15.16 93.27,14.17 92.89,13.79 92.89,13.24 92.71,13.06 92.71,11.43 95.89,8.25 95.89,1.91 96.52,1.27 100.33,1.27 101.6,2.54 101.6,6.15 101.8,6.35 107.31,6.35 107.95,6.99 U6.1
N00048_6359: length 6.7
  TOP w0.203: U6.2 106.45,12.7 106.27,12.88 v1(106.27,13.56)
  BOTTOM w0.203: R3.2 v1(106.27,13.56)
N00060_6368: length 12.9
  TOP w0.203: U1.6 v1(84.45,16.51)
  BOTTOM w0.203: v1(84.45,16.51) 88.27,16.51 90.94,19.19 93.21,19.19 U23.3
OUTA: length 12.7
  TOP w0.203: v1(90.17,20.32) 91.67,20.32 92.05,19.94 92.05,19.43 91.69,19.08 90.61,19.08 90.17,18.63 90.17,14.99 91.08,14.07 U23.6
  BOTTOM w0.203: L1.1 v1(90.17,20.32)
OUTC: length 11.9
  TOP w0.203: L4.1 v1(91.44,26.03)
  BOTTOM w0.203: v1(91.44,26.03) 93.34,26.03 93.98,26.67 93.98,30.65 92.18,32.45 U22.6
RA0: length 110.8
  TOP w0.203: U16.58 76.96,87.76 v1(78.11,88.9) ; v1(108.59,58.42) U11.5 107.95,59.82 106.22,61.54 102.8,61.54 102.26,61.01 102.26,58.45 99.21,55.4 95.59,55.4 95.28,55.7 85.75,55.7 83.82,57.63 U12.5 83.82,65.72 83.97,65.87 83.97,66.14 83.47,66.64 83.57,66.74 83.57,69.55 83.41,69.7 83.41,71.23 83.82,71.64 U8.5 83.82,80.26 83.62,80.47 83.47,80.61 83.57,80.71 83.57,83.12 83.54,83.29 83.57,83.31 83.82,83.57 83.82,84.36 84.25,84.8 84.25,85.14 83.82,85.57 U13.5 v1(83.82,88.9) ; v1(107.95,71.12) U10.5 107.95,80.26 107.34,80.87 107.34,83.57 107.95,84.18 U3.5
  BOTTOM w0.203: v1(78.11,88.9) v1(83.82,88.9) ; v1(107.95,71.12) 107.95,59.05 v1(108.59,58.42)
RA1: length 114.1
  TOP w0.203: U3.4 106.68,85.57 106.25,85.14 106.25,84.96 105.23,83.95 105.23,83.31 105.66,83.31 106.02,82.96 106.02,80.92 106.68,80.26 U10.4 v1(106.68,71.12) ; 66.55,90.3 v1(77.6,90.3) ; v1(107.31,58.42) U11.4 106.68,60.21 105.75,61.14 103.91,61.14 103.53,60.76 103.53,57.25 102.95,56.68 102.21,56.68 101.85,57.03 101.42,57.03 99.38,54.99 95.42,54.99 95.11,55.29 84.89,55.29 82.55,57.63 U12.4 82.55,62.64 83.16,63.25 83.16,66.38 82.9,66.64 83.16,66.9 83.16,69.38 83.01,69.53 83.01,70.27 82.55,70.73 U8.4 82.55,74.57 83.36,75.39 83.36,80.14 82.9,80.61 83.16,80.87 83.16,82.96 83.13,82.98 83.13,83.46 83.37,83.69 83.37,84.49 83.57,84.69 83.57,84.96 83.21,85.32 83.21,85.7 U13.4 82.55,86.36 83.11,86.36 83.11,87.91 82.68,88.34 v1(82.68,90.3)
  BOTTOM w0.203: v1(106.68,71.12) 107.31,70.48 v1(107.31,58.42) ; v1(77.6,90.3) v1(82.68,90.3)
RA2: length 115.5
  TOP w0.203: v1(80.64,92.71) 80.64,92.08 v1(80.14,91.57) 80.82,90.88 80.82,87.9 81.05,87.67 81.48,87.23 81.48,86.56 U13.3 81.28,85.28 81.05,85.05 81.05,84.48 80.7,84.12 80.7,82.98 80.67,82.96 80.67,80.87 81.1,80.44 81.1,76.83 80.9,76.62 80.9,75.78 81.28,75.39 U8.3 81.28,71.65 81.03,71.4 81.03,71.18 80.29,70.44 80.29,69.32 80.67,68.94 80.67,66.9 81.28,66.29 U12.3 81.28,57.63 84.03,54.89 94.94,54.89 95.24,54.58 102.53,54.58 104.98,57.03 104.98,57.2 105.41,57.63 U11.3 v1(105.41,60.32) ; v1(105.41,71.12) 105.41,71.32 105.59,71.32 105.59,72.1 105.41,72.27 U10.3 105.41,80.26 104.8,80.87 104.8,84.09 105.41,84.7 U3.3 ; U16.61 v1(77.6,91.57) ; U9.3 v1(80.64,99.69)
  BOTTOM w0.203: v1(80.64,99.69) v1(80.64,92.71) ; v1(77.6,91.57) v1(80.14,91.57) ; v1(105.41,71.12) 105.41,70.15 105.23,69.98 105.23,69.09 104.98,68.83 104.98,67.06 105.41,66.62 v1(105.41,60.32)
RA3: length 136.3
  TOP w0.203: 79.12,91.14 79.12,91.99 79.25,92.12 v1(79.25,92.84) 79.25,94.74 79.35,94.84 v1(79.35,96.39) ; 79.12,91.14 80.01,90.25 U13.2 80.26,86.61 v1(80.26,86.93) ; 79.12,91.14 79.12,88.38 79.76,87.75 79.76,87.47 ; U16.62 v1(77.34,92.84) ; 79.76,87.47 79.47,87.18 79.47,86.67 79.82,86.32 ; 79.76,87.47 79.76,85.83 80.01,85.57 80.01,84.59 80,84.58 79.88,84.45 79.88,84.01 79.35,83.48 79.35,80.35 80.01,79.69 80.01,73.92 79.79,73.69 80.01,73.46 U8.2 80.01,71.43 80.04,71.4 79.93,71.4 79.35,71.98 79.35,73.61 79.17,73.79 78.31,73.79 78.13,73.61 78.13,71.17 78.31,70.99 78.99,70.99 79.35,70.64 79.35,66.95 80.01,66.29 U12.2 80.01,57.63 83.16,54.48 94.77,54.48 95.07,54.18 102.82,54.18 106.02,57.38 106.02,60.29 105.58,60.73 105.05,60.73 104.14,59.82 U11.2 v1(104.78,59.05) ; v1(79.35,99.67) U9.2 ; v1(104.78,71.12) 104.78,71.75 U10.2 104.14,80.26 103.53,80.87 103.53,83.57 104.14,84.18 U3.2
  BOTTOM w0.203: v1(104.78,71.12) 104.78,69.21 104.57,69 104.57,66.89 104.78,66.68 v1(104.78,59.05) ; v1(80.26,86.93) v1(80.08,86.93) ; v1(79.35,96.39) v1(79.35,99.67) ; v1(77.34,92.84) v1(79.25,92.84)
RA4: length 59.8
  TOP w0.203: U10.32 102.87,75.36 103.48,74.75 103.48,73.96 103.3,73.79 102.44,73.79 102.26,73.61 102.26,71.17 102.87,70.56 U11.32 ; U12.32 78.13,67.95 77.72,68.35 77.72,73.78 78.74,74.8 U8.32 78.74,82.7 77.72,83.72 77.72,84.15 78.54,84.96 79.17,84.96 79.35,85.14 79.35,86.22 79.06,86.5 79.06,87.35 79.32,87.61 79.17,87.76 78.84,87.76 78.71,87.88 78.71,89.15 78.64,89.23 78.64,93.09 78.74,93.19 U13.32 78.13,95.89 76.35,94.11 U16.63
RA5: length 62.1
  TOP w0.203: 66.55,95.38 76.9,95.38 78.13,96.6 78.13,96.93 78.49,97.28 78.99,97.28 79.17,97.1 79.58,97.1 80.01,96.67 U13.31 80.01,92.3 79.53,91.82 79.53,91.31 80.42,90.42 80.42,87.64 80.67,87.39 80.67,85.25 80.47,85.05 80.47,84.48 80.29,84.28 80.29,83.71 80.01,83.43 80.01,82.99 ; U10.31 104.14,80.96 104.8,80.3 104.8,71.35 105.16,70.99 105.38,70.99 105.38,70.87 104.14,69.62 U11.31 ; U12.31 79.88,68.07 79.88,70.61 80.62,71.35 80.62,73.43 80.42,73.63 80.42,80.55 80.36,80.61 80.26,80.7 80.26,83.31 80.05,83.31 79.87,83.13 80.01,82.99 ; 80.01,82.99 U8.31
RA6: length 62.1
  TOP w0.203: U16.65 77.27,96.65 78.32,97.69 79.16,97.69 79.34,97.51 80.04,97.51 80.44,97.1 80.85,97.1 81.28,96.67 U13.30 81.28,88.82 81.63,88.47 81.63,87.67 81.89,87.4 81.89,85.32 81.63,85.05 81.63,84.47 81.1,83.95 81.1,83.27 81.53,82.84 81.53,82.17 U8.30 81.51,81.69 81.51,80.92 81.69,80.92 81.9,80.72 81.9,80.42 81.51,80.03 81.51,76.66 81.31,76.45 81.31,75.95 81.89,75.36 81.89,71.35 81.53,70.99 81.03,70.99 81.28,70.74 81.28,70.73 80.7,70.15 80.7,69.49 81.1,69.08 81.1,68.12 U12.30 ; U11.30 105.41,68.73 104.98,69.16 104.98,69.82 106.02,70.87 106.02,80.35 105.41,80.96 U10.30
RA7: length 104.6
  TOP w0.203: v1(104.17,67.11) 104.8,67.11 104.8,66.9 105.16,66.55 105.66,66.55 106.68,67.56 U11.29 106.68,68.73 107.29,69.34 107.29,80.35 106.68,80.96 U10.29 ; v1(81.92,76.2) 81.92,80.49 ; 81.92,80.49 82.55,81.13 U8.29 ; 81.92,80.49 81.92,81.33 81.94,81.35 81.94,82.48 82.73,83.27 82.73,83.63 82.92,83.83 82.92,84.54 82.5,84.96 82.3,84.96 82.2,85.06 82.3,85.15 82.3,87.57 82.2,87.66 82.44,87.89 82.44,88.3 82.27,88.46 82.27,89.84 82.07,90.04 82.07,90.55 82.55,91.03 U13.29 82.17,95.89 81.89,96.16 81.89,96.4 82.73,97.24 82.73,97.92 82.25,98.39 81.58,98.39 80.87,97.69 80.43,97.69 80.03,98.09 78.15,98.09 77.97,97.92 U16.66 ; v1(99.06,62.86) 99.06,64.77 v1(100.97,66.67) ; v1(82.55,69.12) U12.29 82.55,67.16 82.12,66.73 82.12,63.93 v1(82.55,63.5)
  BOTTOM w0.203: v1(99.06,62.86) 98.42,63.5 v1(82.55,63.5) ; v1(81.92,76.2) 82.98,75.13 82.98,72.18 83.79,71.36 84.16,71.36 84.36,71.57 84.87,71.57 85.9,70.53 85.9,69.72 85.43,69.25 84.75,69.25 84.08,69.92 83.34,69.92 v1(82.55,69.12) ; v1(100.97,66.67) 103.73,66.67 v1(104.17,67.11)
